# Altium PCB Sheet1.PcbDoc
Units mm, origin at the board's own origin, x right, y up, seen from the top; angles counter-clockwise.
Board outline 50 x 50 mm, 6 copper layers (L1, L2, L3, L4, L5, L6), stack 0.816 mm thick; 41 components, 27 nets, 119 pads, 58 vias.
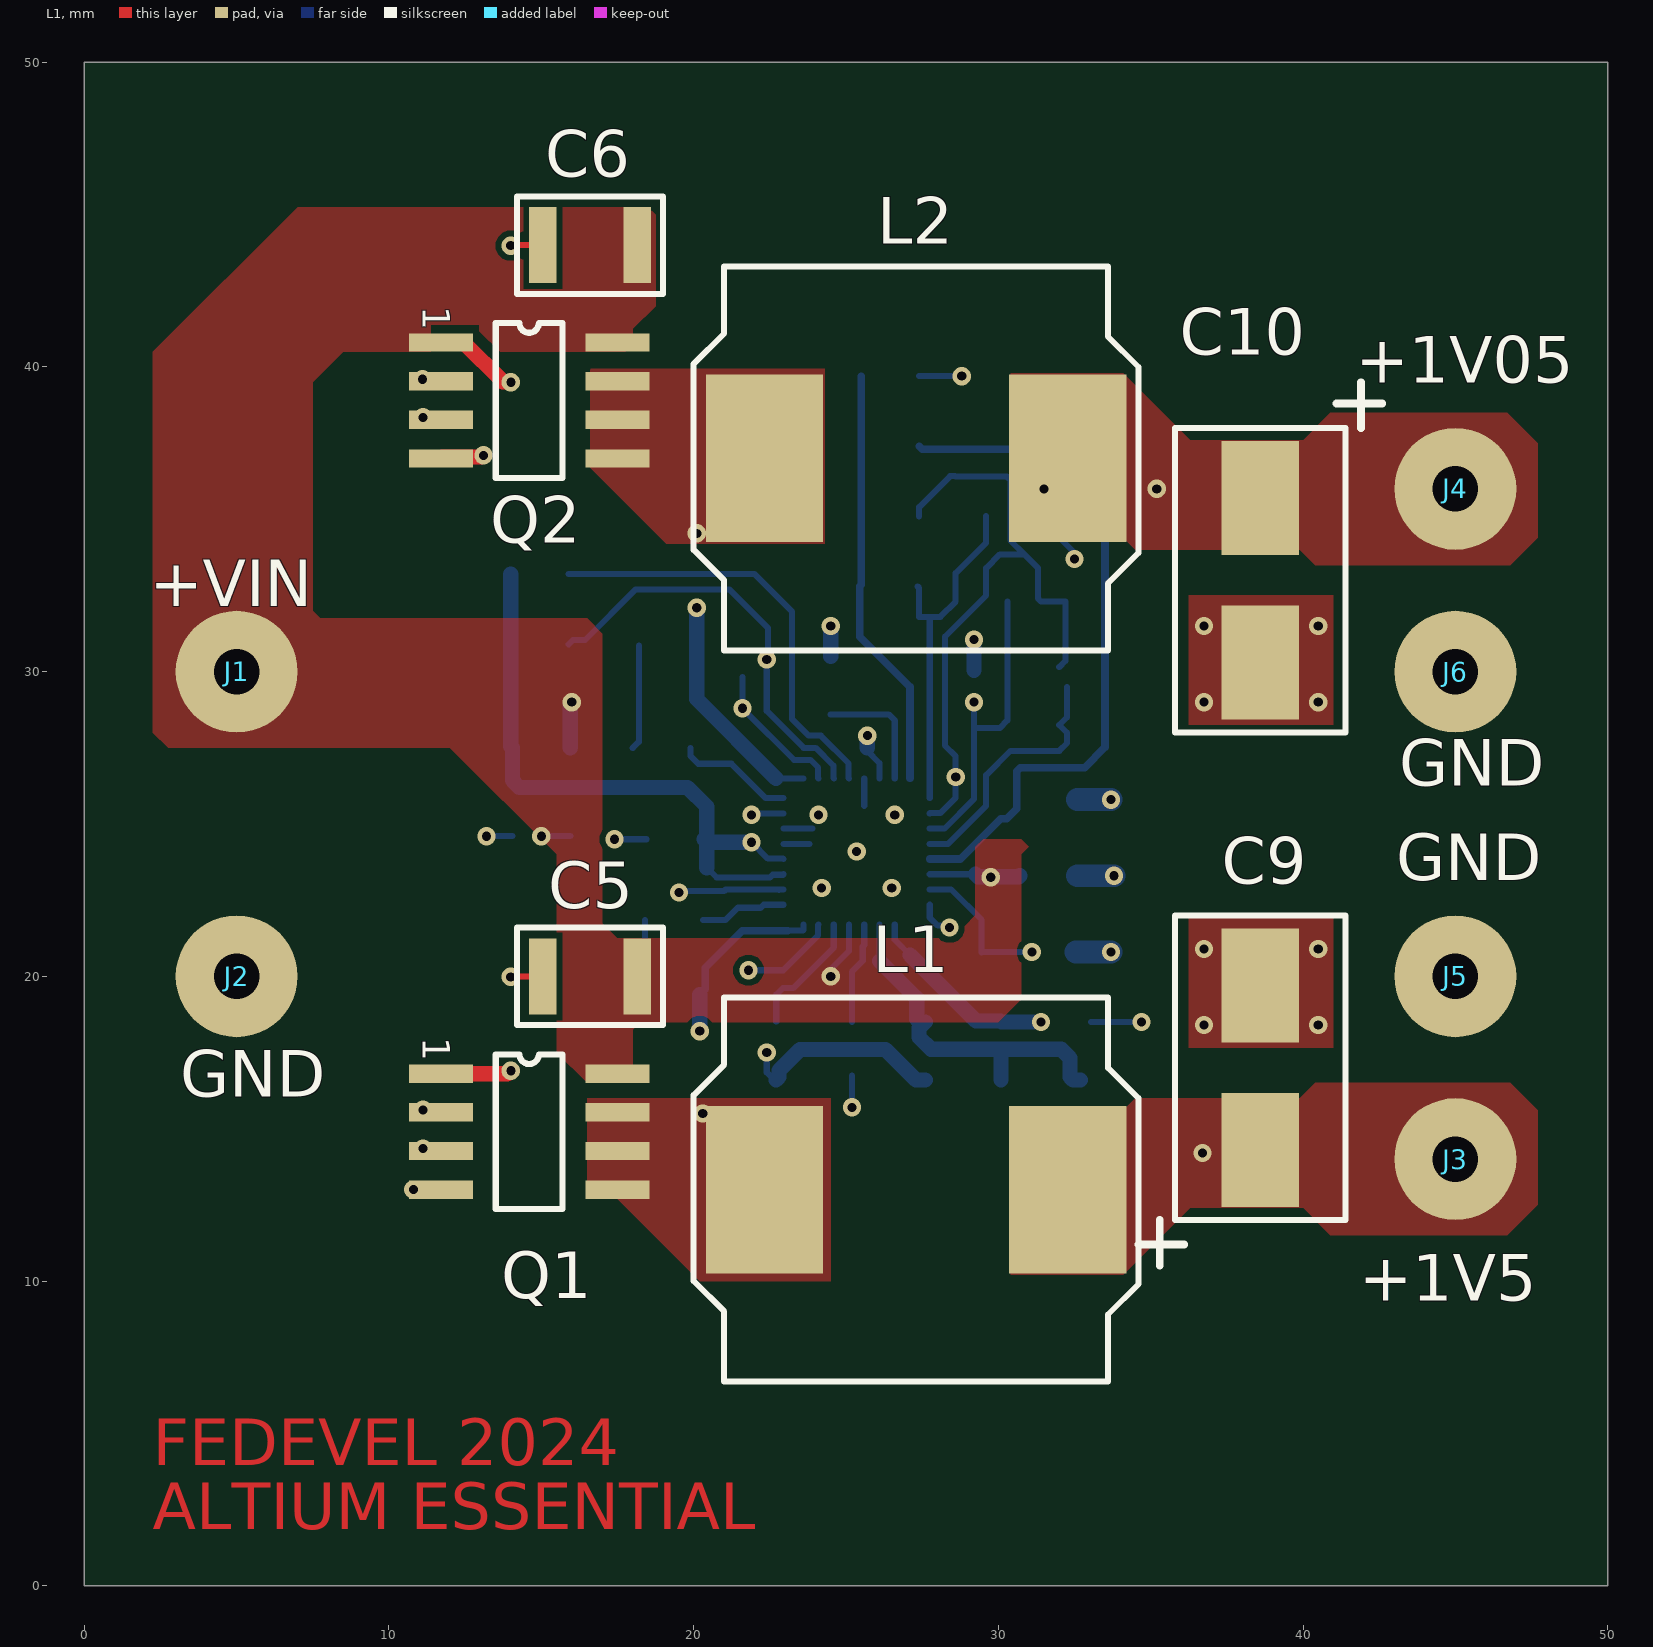
[diagram p0: L1 view]
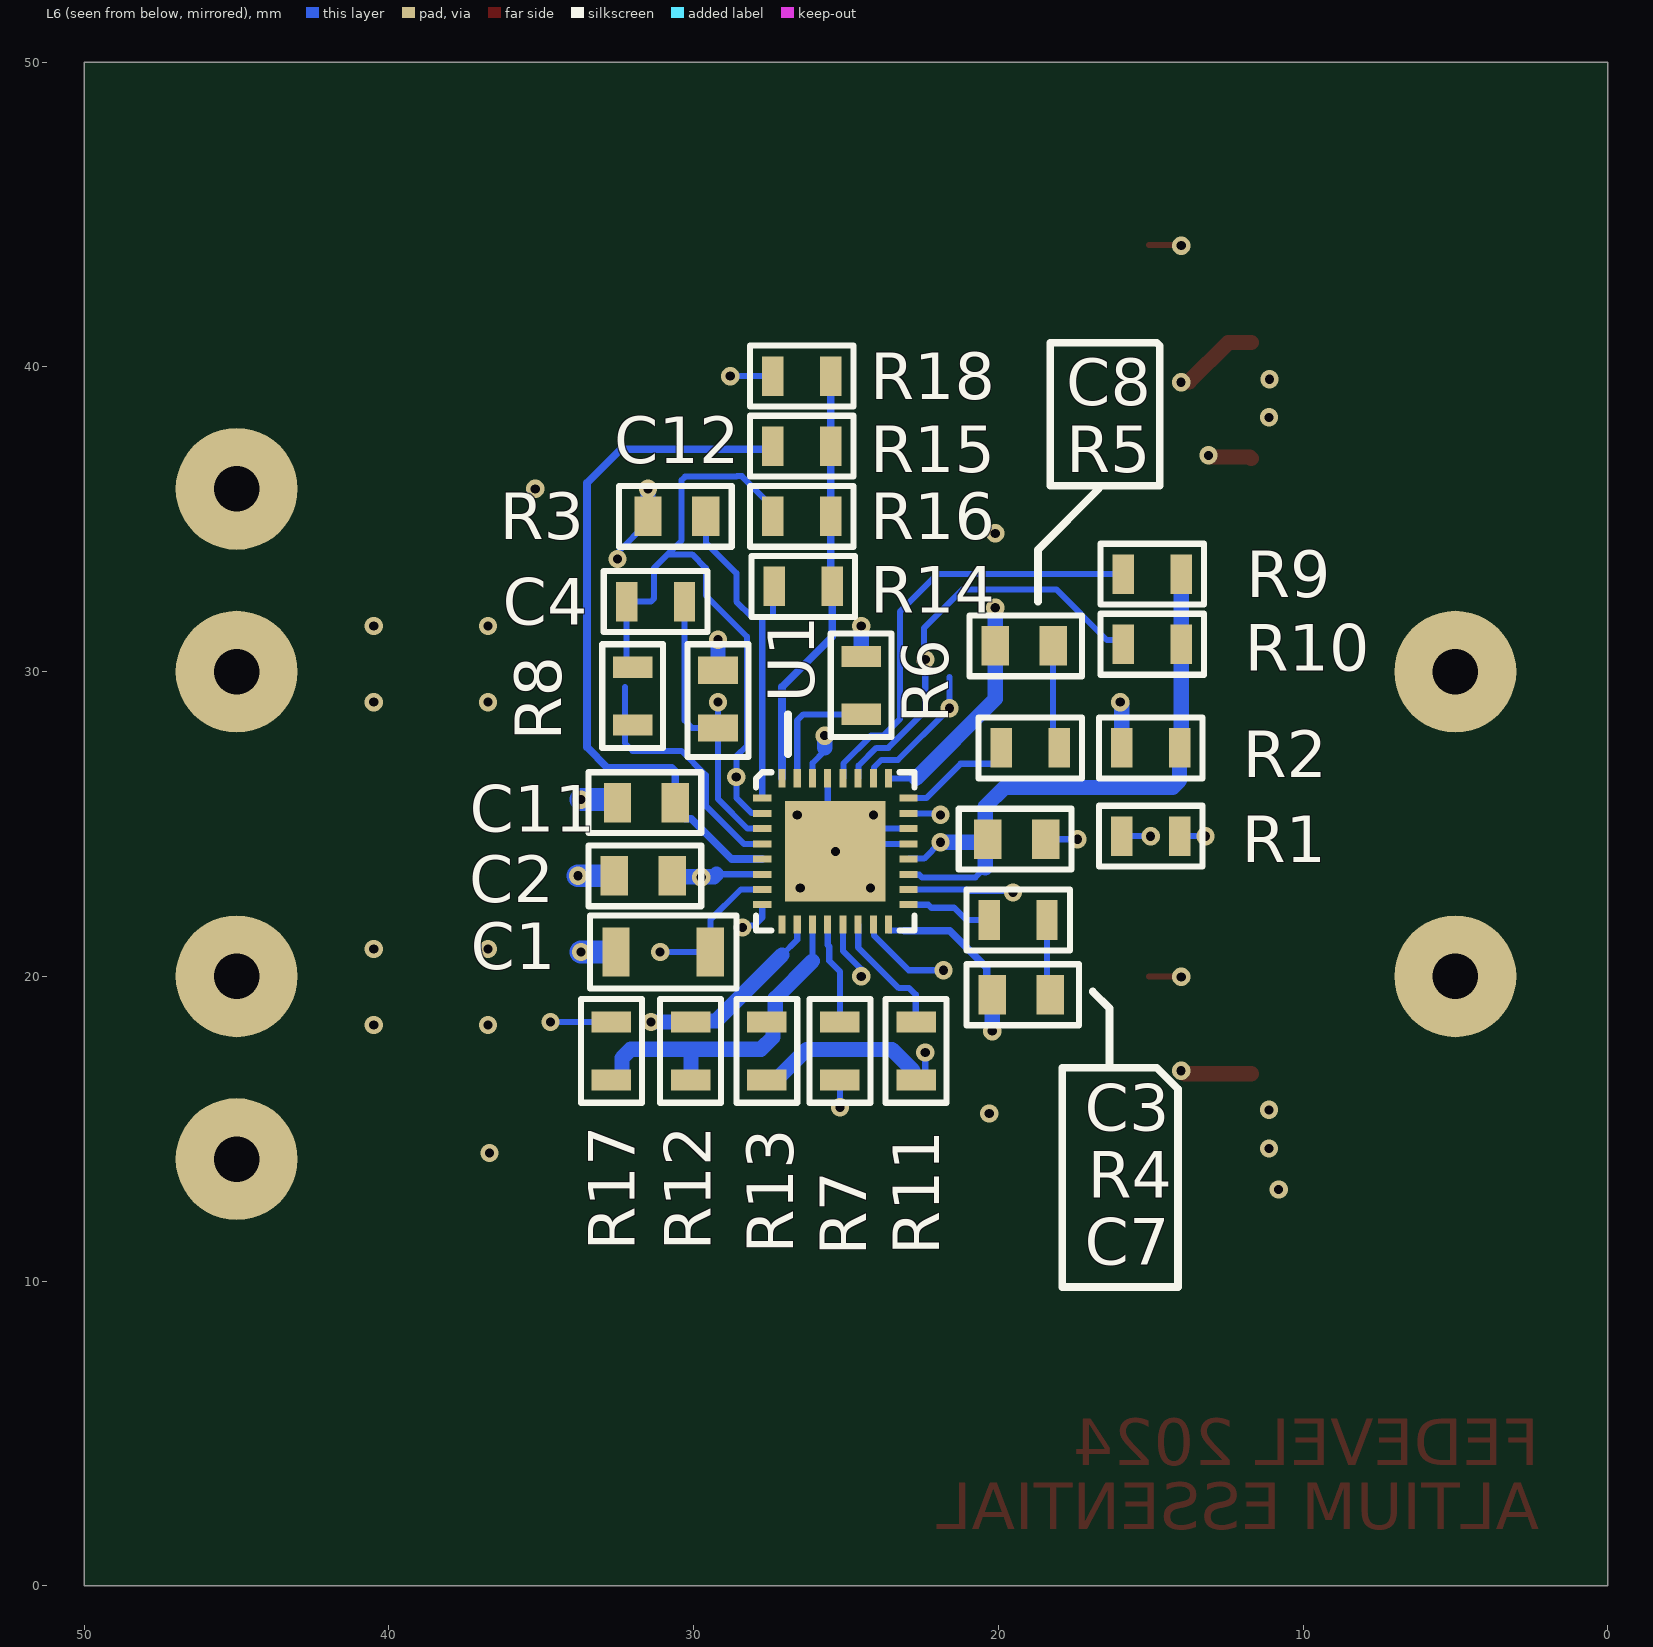
[diagram p1: L6 view, seen from below]
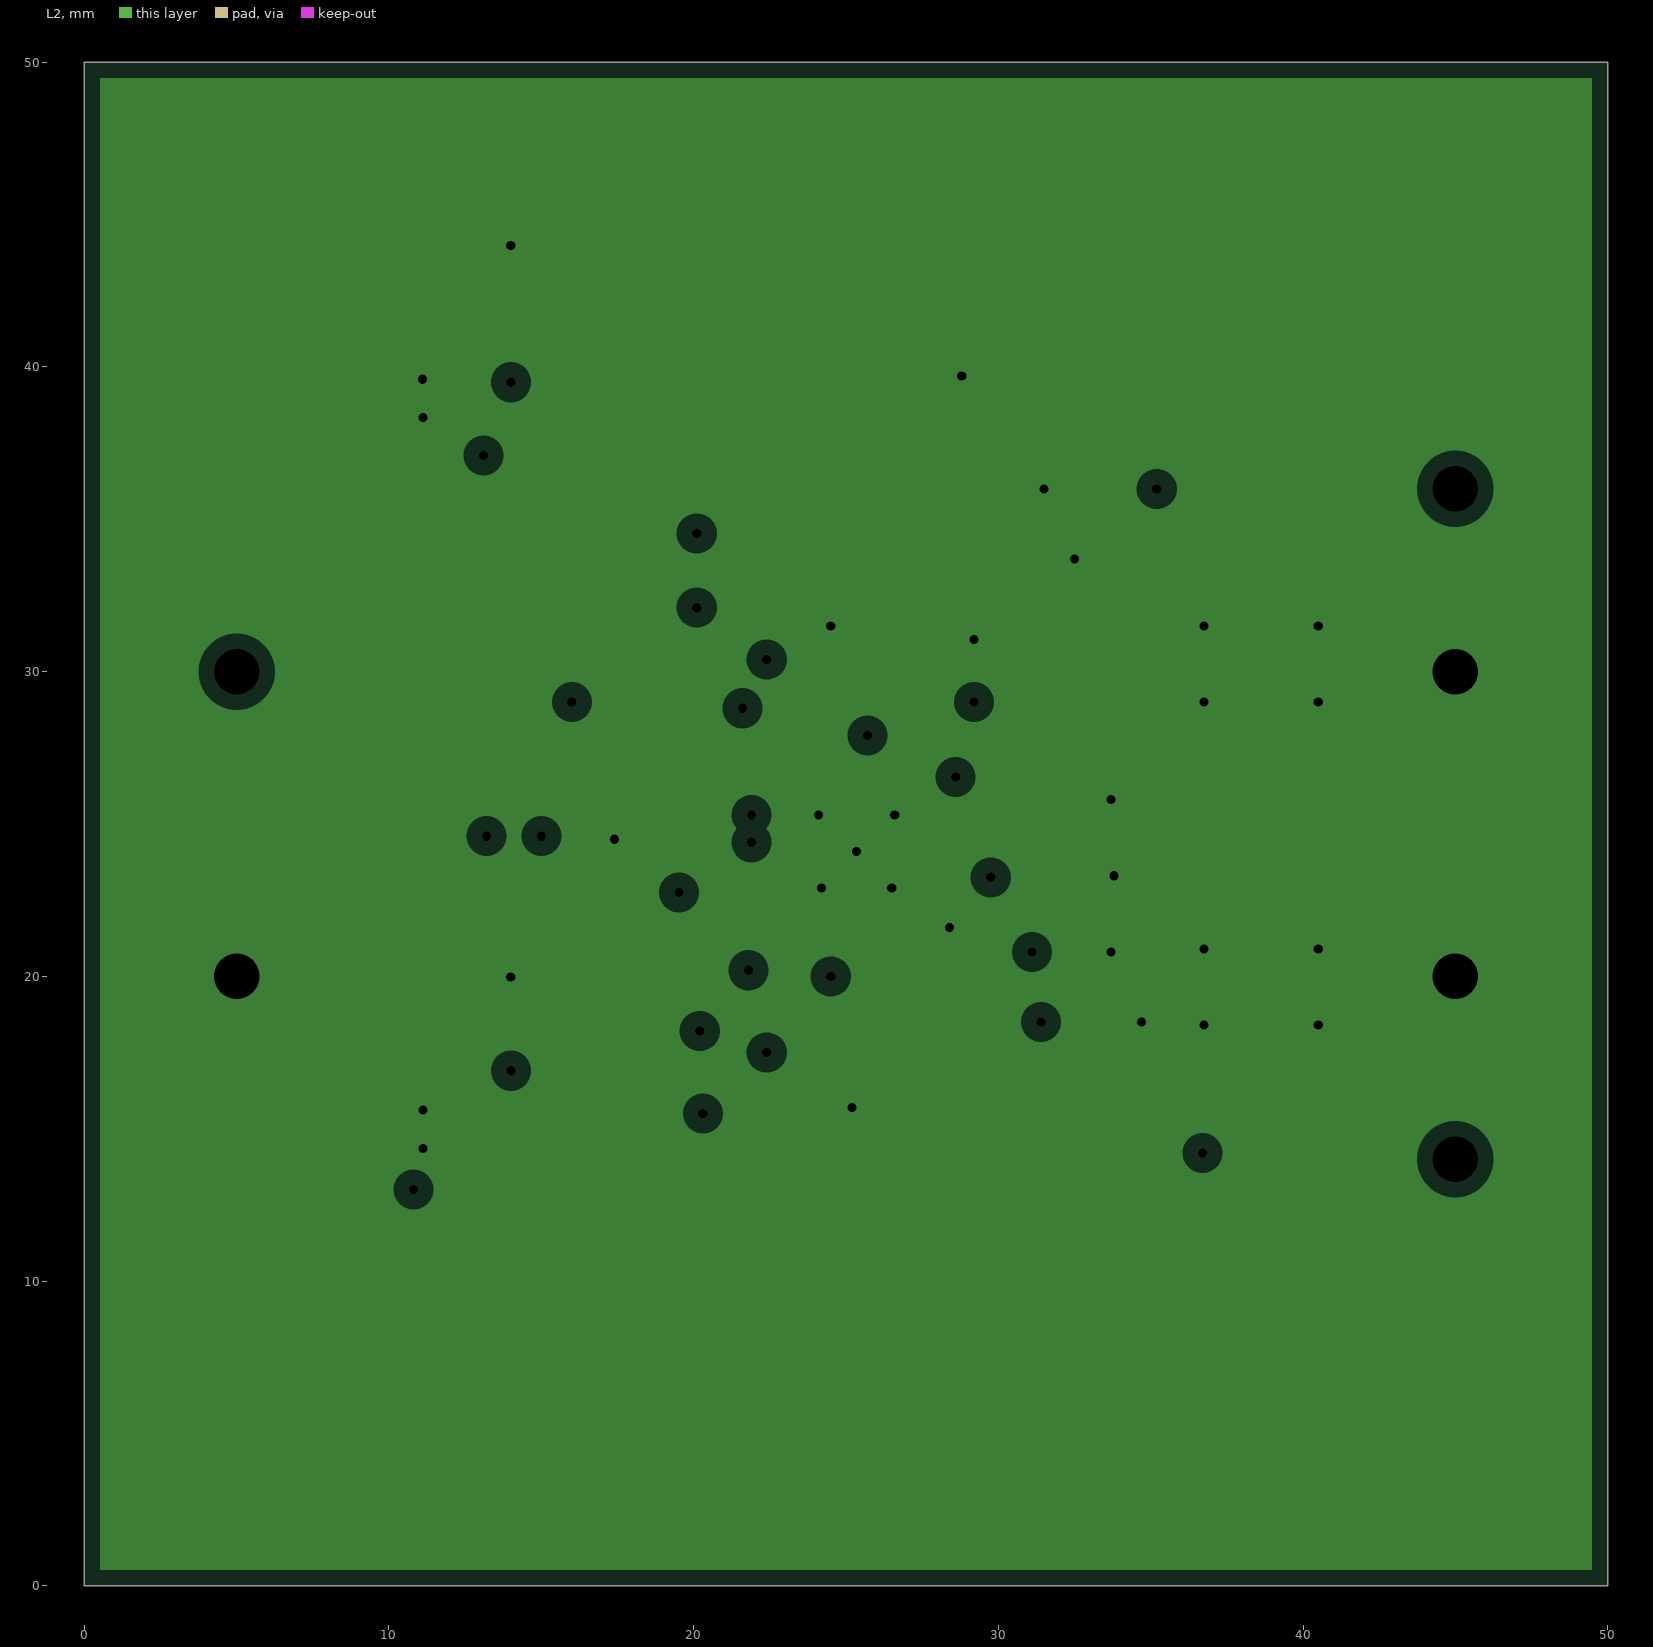
[diagram p2: L2, clearances drawn from the general rule]
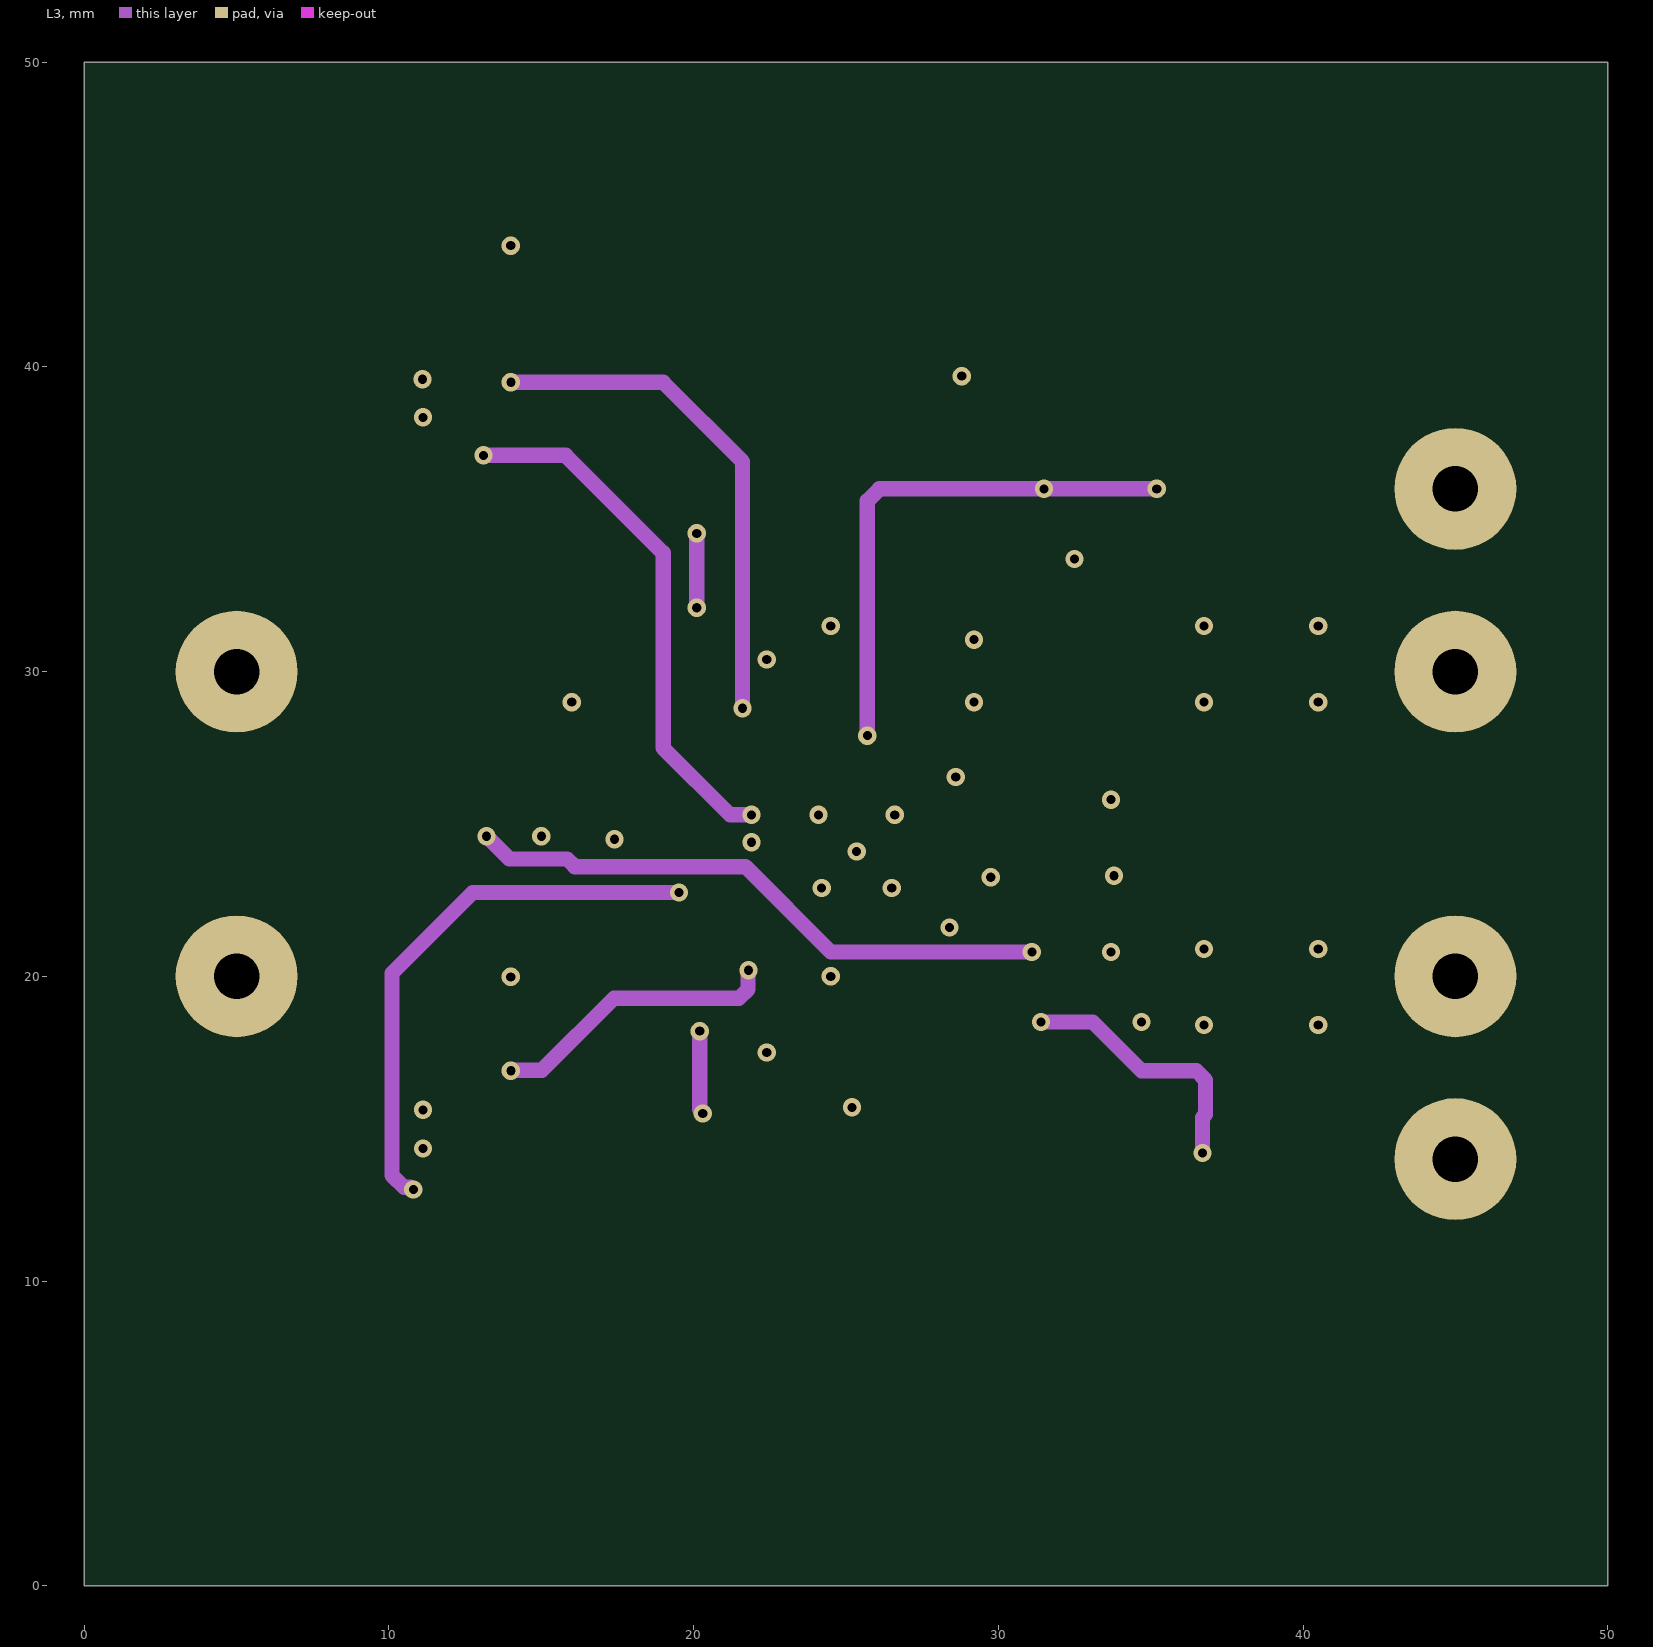
[diagram p3: L3]
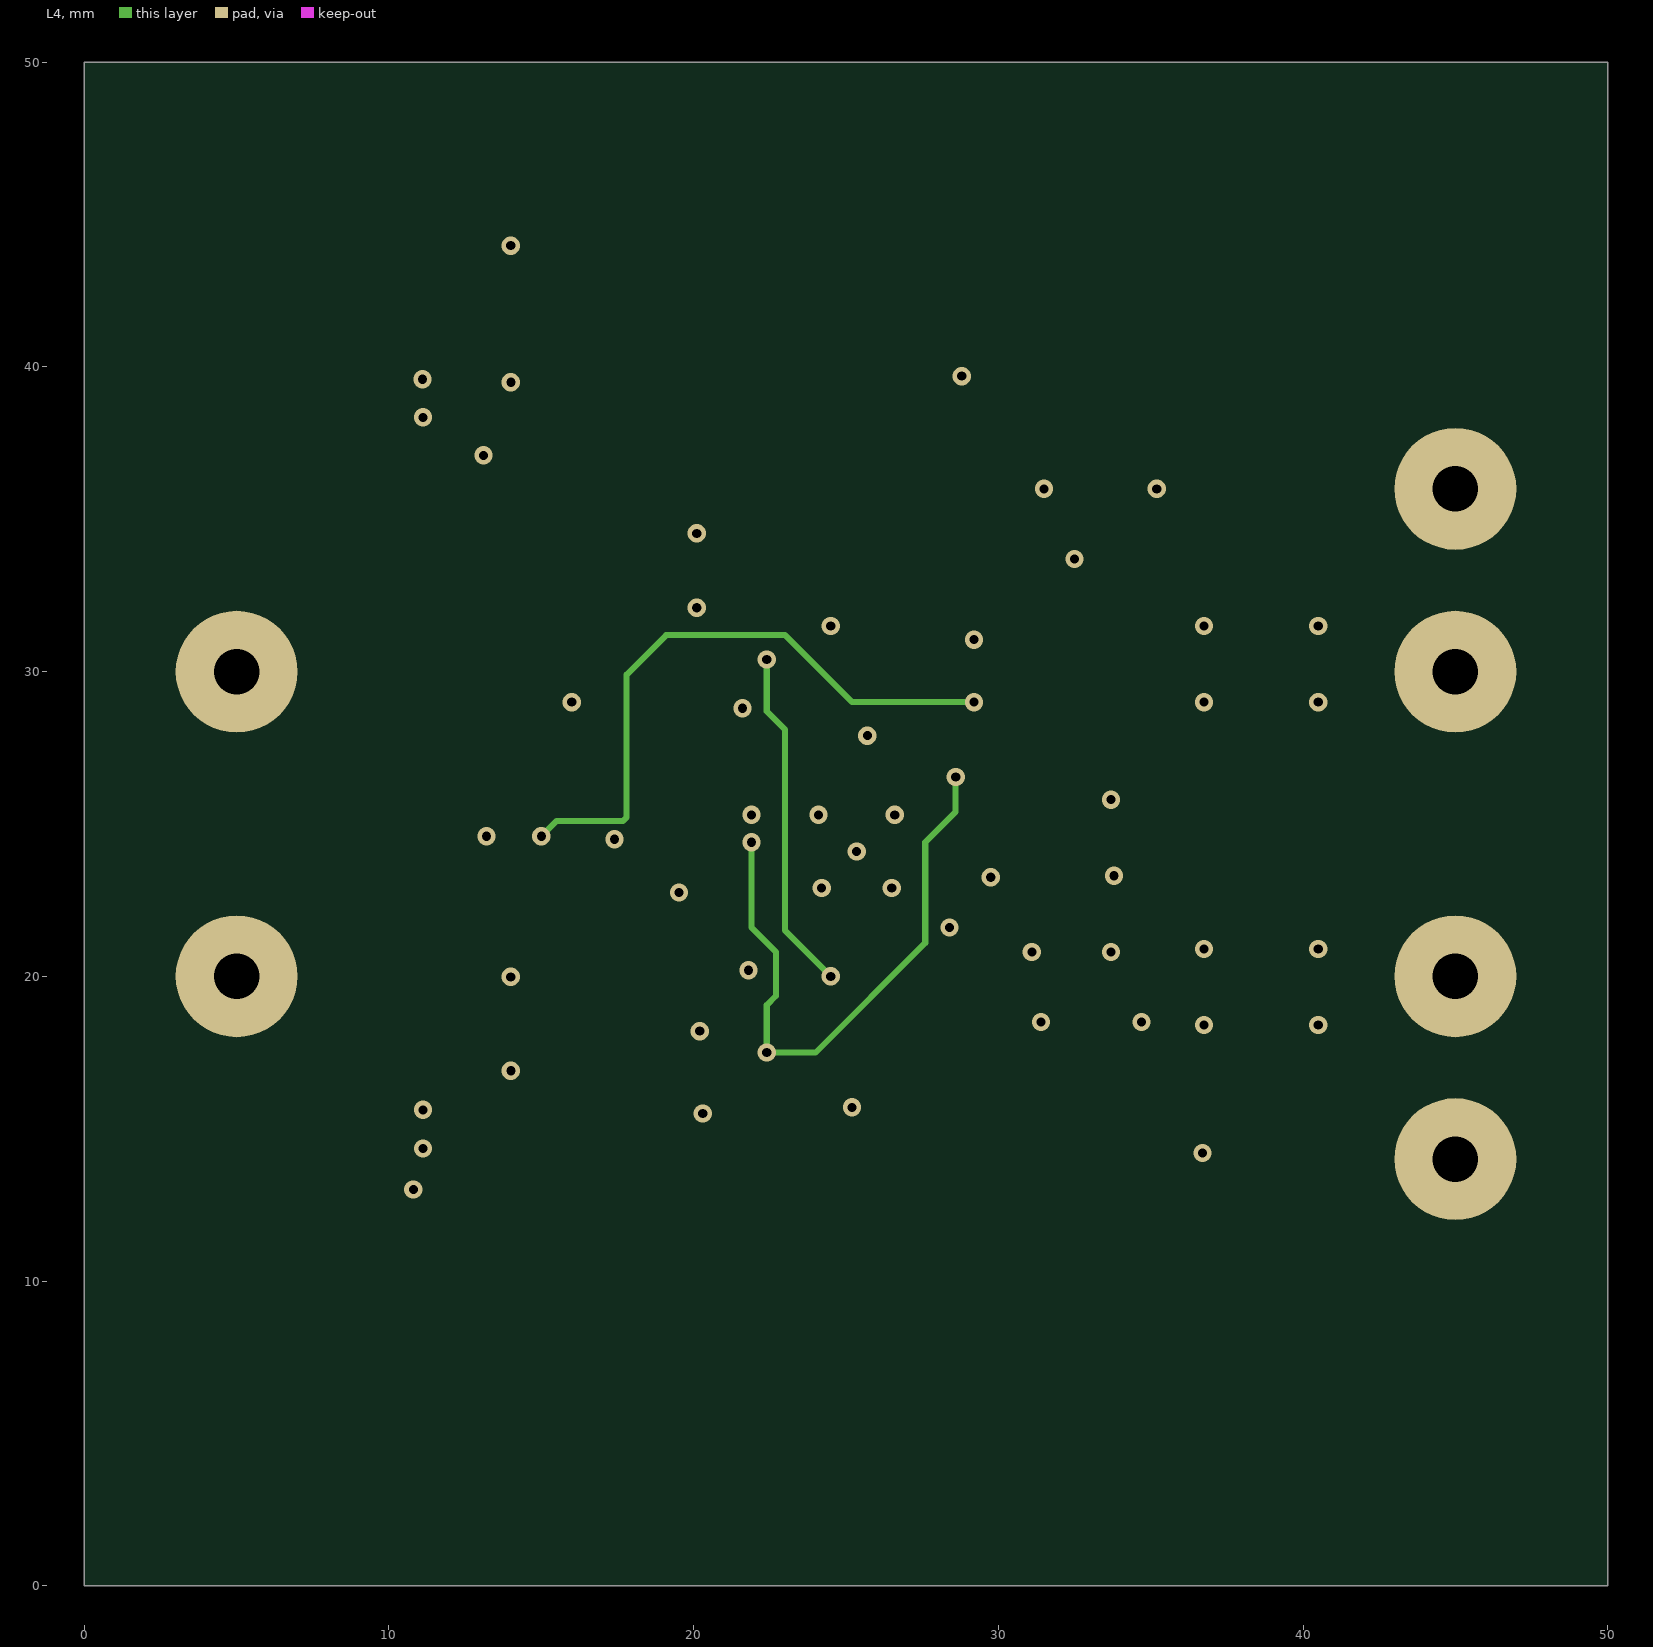
[diagram p4: L4]
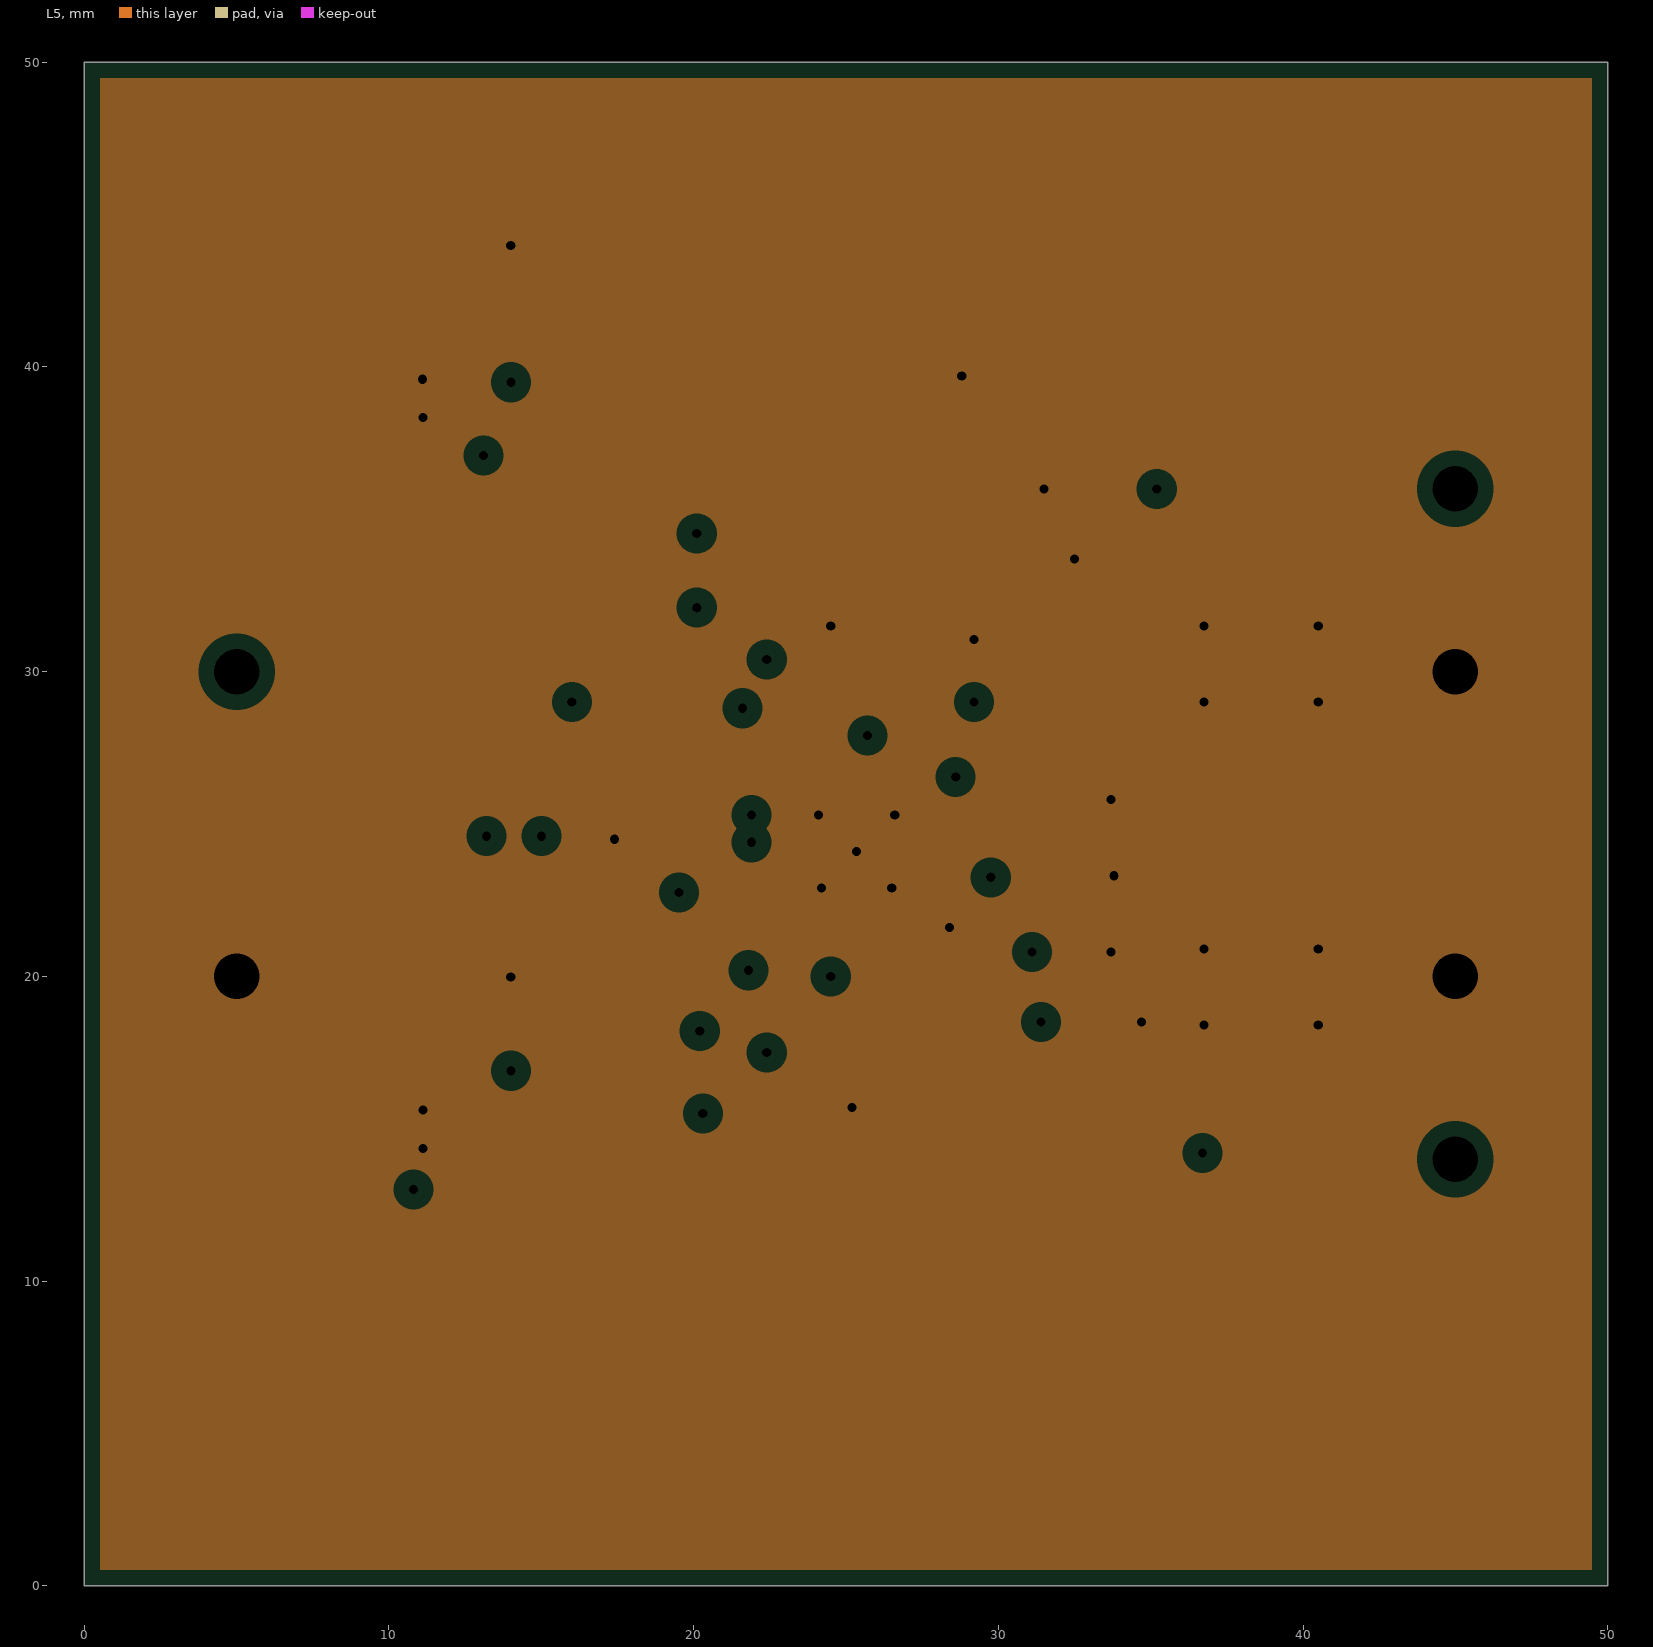
[diagram p5: L5, clearances drawn from the general rule]

## Layer stack, top to bottom
Top Solder: solder mask 0.0102, Solder Resist, Dk 3.5
L1: signal copper 0.0356
Dielectric 2: prepreg 0.0711, PP-006, Dk 4.1
L2: plane copper 0.035, net GND
Dielectric 3: prepreg 0.0711, PP-006, Dk 4.1
L3: signal copper 0.035
Dielectric 4: prepreg 0.0711, PP-006, Dk 4.1
L4: signal copper 0.035
Dielectric 5: prepreg 0.0711, PP-006, Dk 4.1
L5: plane copper 0.035, net GND
Dielectric 1: dielectric 0.32, FR-4, Dk 4.8
L6: signal copper 0.0356
Bottom Solder: solder mask 0.0102, Solder Resist, Dk 3.5

## Board outline
0,0 50,0 50,50 0,50

## Design rules (kind name [scope] priority, off if disabled: settings)
Clearance [All] p1: gap=0.2 ignorepadtopadclearanceinfootprint=FALSE
ComponentClearance [All] p1: gap=0.1 collisioncheckmode=3 verticalgap=0.1 showdistances=FALSE
MinimumSolderMaskSliver [All] p1: minsoldermaskwidth=0.1
PlaneClearance [All] p1: clearance=0.508
PlaneConnect [All] p1: planeconnectstyle=Relief reliefexpansion=0.508 reliefentries=4 reliefconductorwidth=0.254 reliefairgap=0.254
PolygonConnect [All] p1: connectstyle=Direct reliefconductorwidth=0.254 reliefentries=4 polygonreliefangle="90 Angle" airgapwidth=0.254
RoutingVias [All] p1: holewidth=0.3 width=0.6 viastyle="Through Hole" minholewidth=0.3 minwidth=0.6 maxholewidth=0.3 maxwidth=0.6
SilkToSolderMaskClearance [IsPad] p1: minsilkscreentomaskgap=0.1 clearancetoexposedcopper=TRUE
SolderMaskExpansion [All] p1: expansion=0.102 istentingtop=FALSE
Width [All] p1: maxlimit=10 minlimit=0.2 preferedwidth=0.2
25 further rules are at their usual default settings.

## Components (designator, comment, footprint, x,y, rotation, side; value= is the part's Value field where it differs from the comment)
C1 "4u7, 50V" C1206 31,20.8 r180 bottom value=4.7uF
C2 "1uF, 50V" C0805 31.65,23.3 r180 bottom value=1uF
C3 "1uF, 50V" C0805 19.4,24.5 r0 bottom value=1uF
C4 "1uF, 50V" C0805 29.2,29.1 r270 bottom value=1uF
C5 "10uF" C1210 16.6,20 r0 top
C6 "10uF" C1210 16.6,44 r0 top
C7 "100nF,50V" C0805 19.25,19.396 r180 bottom value=100nF
C8 "220nF, 50V" C0805 19.15,30.85 r180 bottom value=220nF
C9 "330uF, 10V" 7343-43 38.6,17 r90 top value=330uF
C10 "330uF, 10V" 7343-43 38.6,33 r270 top value=330uF
C11 "10nF, 50V" C0805 31.55,25.7 r0 bottom value=10nF
C12 "100nF,50V" C0805 30.55,35.1 r0 bottom value=100nF
J1 "400x150" PAD_400x150 5,30 r0 top
J2 "400x150" PAD_400x150 5,20 r0 top
J3 "400x150" PAD_400x150 45,14 r0 top
J4 "400x150" PAD_400x150 45,36 r0 top
J5 "400x150" PAD_400x150 45,20 r0 top
J6 "400x150" PAD_400x150 45,30 r0 top
L1 "3u3" DR125 27.3,13 r180 top value=3.3uH
L2 "2u2" DR125 27.3,37 r0 top value=2.2uH
Q1 "SI4816BDY-T1-E3" SO-8 14.6,14.9 r0 top
Q2 "SI4816BDY-T1-E3" SO-8 14.6,38.9 r0 top
R1 "0R" R0805 15,24.6 r180 bottom
R2 "0R" R0805 15,27.5 r180 bottom
R3 "10R" R0805 31.25,32.3 r180 bottom
R4 "1R" R0805 19.35,21.85 r0 bottom
R5 "1R" R0805 18.95,27.5 r180 bottom
R6 "200K" R0805 24.5,29.55 r90 bottom value=200kR
R7 "200K" R0805 25.2,17.55 r90 bottom value=200kR
R8 "10K" R0805 32,29.2 r270 bottom value=10kR
R9 "200K" R0805 14.95,33.2 r180 bottom value=200kR
R10 "200K" R0805 14.95,30.9 r180 bottom value=200kR
R11 "10K" R0805 22.7,17.55 r90 bottom value=10kR
R12 "DNP" R0805 30.1,17.55 r90 bottom
R13 "0R" R0805 27.6,17.55 r270 bottom
R14 "DNP" R0805 26.4,32.8 r0 bottom
R15 "0R" R0805 26.45,37.4 r0 bottom
R16 "DNP" R0805 26.45,35.1 r0 bottom
R17 "DNP" R0805 32.7,17.55 r270 bottom
R18 "DNP" R0805 26.45,39.7 r180 bottom
U1 "ISL6236AIRZ" L32.5X5B 25.35,24.1 r180 bottom

## Footprints (in the part's own frame and the unit in brackets; to place one, negate y for a bottom-side part, rotate by r counter-clockwise, add the part's x,y. Pads: shape width x height; smd on the part's side, far side on the other; paste and mask are expansions set on the pad)
7343-43 [mm]
  rect 3.75x2.55 smd: 1(-2.7,0) 2(2.7,0)
  silkscreen extent -6.5,-2.8 5,4
C0805 [mm]
  rect 0.9x1.3 smd: 1(-0.95,0) 2(0.95,0)
  silkscreen extent -1.8,-1 1.9,1
C1206 [mm]
  rect 0.9x1.6 smd: 1(-1.55,0) 2(1.55,0)
  silkscreen extent -2.4,-1.2 2.4,1.2
C1210 [mm]
  rect 0.9x2.5 smd: 1(-1.55,0) 2(1.55,0)
  silkscreen extent -2.4,-1.6 2.4,1.6
DR125 [mm]
  rect 3.85x5.5 smd: 1(-4.975,0) 2(4.975,0)
  silkscreen extent -7.3,-6.3 7.3,6.3
L32.5X5B [mm]
  rect 0.6x0.23 smd mask+0.051: 1(-2.4,1.75) 2(-2.4,1.25) 3(-2.4,0.75) 4(-2.4,0.25) 5(-2.4,-0.25) 6(-2.4,-0.75) 7(-2.4,-1.25) 8(-2.4,-1.75) 17(2.4,-1.75) 18(2.4,-1.25) 19(2.4,-0.75) 20(2.4,-0.25) 21(2.4,0.25) 22(2.4,0.75) 23(2.4,1.25) 24(2.4,1.75)
  rect 0.23x0.6 smd mask+0.051: 9(-1.75,-2.4) 10(-1.25,-2.4) 11(-0.75,-2.4) 12(-0.25,-2.4) 13(0.25,-2.4) 14(0.75,-2.4) 15(1.25,-2.4) 16(1.75,-2.4) 25(1.75,2.4) 26(1.25,2.4) 27(0.75,2.4) 28(0.25,2.4) 29(-0.25,2.4) 30(-0.75,2.4) 31(-1.25,2.4) 32(-1.75,2.4)
  rect 3.3x3.3 smd: 33(0,0)
  silkscreen extent -2.6,-2.6 2.6,2.6
PAD_400x150 [mm]
  round 4 hole 1.5: 1(0,0)
R0805 [mm]
  rect 0.7x1.3 smd: 1(-0.95,0) 2(0.95,0)
  silkscreen extent -1.7,-1 1.7,1
SO-8 [mm]
  rect 2.1x0.6 smd: 1(-2.9,1.905) 2(-2.9,0.635) 3(-2.9,-0.635) 4(-2.9,-1.905) 5(2.9,-1.905) 6(2.9,-0.635) 7(2.9,0.635) 8(2.9,1.905)
  silkscreen extent -1.1,-2.54 1.1,2.54

## Part data
C1: library part C3216X5R1H475K160AB, "C Series 1206 4.7 uF 50 V ±10 % Tolerance X5R SMT Multilayer Ceramic Capacitor", Case Code (Imperial)=1206, Case Code (Metric)=3216, Dielectric=X5R, Dielectric Material=Ceramic, Manufacturer=TDK, Max Operating Temperature=85°C, Min Operating Temperature=-55°C, Package Quantity=2000, Supplier Part Number=445-5994-1-ND, Tolerance=10%, Voltage Rating=50V, Case/Package=1206, Category="Ceramic Capacitors", ComponentLink1Description=https://datasheet.ciiva.com/24216/c3216x5r1h475k160ab-265269-24216325.pdf?src-supplier=Mouser, ComponentLink1URL=https://datasheet.ciiva.com/24216/c3216x5r1h475k160ab-265269-24216325.pdf?src-supplier=Mouser, ComponentLink2Description=https://datasheet.ciiva.com/6286/tdkmlcccaprange-6286230.pdf?src-supplier=Digikey, ComponentLink2URL=https://datasheet.ciiva.com/6286/tdkmlcccaprange-6286230.pdf?src-supplier=Digikey, ComponentLink3Description=https://datasheet.ciiva.com/6286/tdkmlcccaprange-6286233.pdf?src-supplier=Digikey, ComponentLink3URL=https://datasheet.ciiva.com/6286/tdkmlcccaprange-6286233.pdf?src-supplier=Digikey, ComponentLink4Description=https://datasheet.ciiva.com/6286/tdkmlcccaprange-6286236.pdf?src-supplier=Digikey, ComponentLink4URL=https://datasheet.ciiva.com/6286/tdkmlcccaprange-6286236.pdf?src-supplier=Digikey, Construction=Flat, Depth=1.6mm, Height=1.6mm, Lead Free="Lead Free", Length=3.2mm, Manufacturer Part Number=C3216X5R1H475K160AB, Mounting Technology="Surface Mount", Packaging="Tape and Reel", Pricing="1=0.73, 10=0.514, 50=0.4326, 100=0.3523, 500=0.29356, 1000=0.2472 (USD)", RoHS=Yes, RoHS Compliant=Yes, Series=C, Stock=60492, Supplier=Digikey, Termination=SMD/SMT, Voltage Rating (DC)=50V, Weight=0.000571oz, Width=1.6mm
C2 C3 C4: library part C0805C105K5RACTU, "Multilayer Ceramic Capacitor, 1 uF, 50 V, ± 10%, X7R, 0805 [2012 Metric]", Case Code (Imperial)=0805, Case Code (Metric)=2012, Dielectric=X7R, Dielectric Material=Ceramic, Manufacturer=KEMET, Max Operating Temperature=125°C, Min Operating Temperature=-55°C, Package Quantity=1, Supplier Part Number=399-C0805C105K5RAC7800CT-ND, Tolerance=10%, Voltage=50V, Case/Package=0805, Category="Ceramic Capacitors", ComponentLink1Description=https://datasheet.ciiva.com/7842/1732744-7842192.pdf?src-supplier=Element14, ComponentLink1URL=https://datasheet.ciiva.com/7842/1732744-7842192.pdf?src-supplier=Element14, ComponentLink2Description=https://datasheet.ciiva.com/5408/kem-c1002-x7r-smd-5408569.pdf?src-supplier=Mouser, ComponentLink2URL=https://datasheet.ciiva.com/5408/kem-c1002-x7r-smd-5408569.pdf?src-supplier=Mouser, Construction=Flat, Depth=1.25mm, Height=1.25mm, Length=2mm, Manufacturer Part Number=C0805C105K5RACTU, Mounting Technology="Surface Mount,PCB", Packaging="Tape and Reel", Pricing="1=0.35, 10=0.231, 50=0.1704, 100=0.1387, 500=0.10954, 1000=0.0925 (USD)", Reach SVHC Compliant=No, RoHS=Yes, RoHS Compliant=Yes, Series=C, Stock=63564, Supplier=Digikey, Termination=SMD/SMT, Thickness=0.055inch, Voltage Rating=50V, Voltage Rating (DC)=50V, Width=0.049inch
C5 C6: library part C1210C106K6PACTU, "Multilayer Ceramic Capacitor, 10 uF, 35 V, ± 10%, X5R, 1210 [3225 Metric]", Case Code (Imperial)=1210, Case Code (Metric)=3225, Dielectric=X5R, Dielectric Material=Ceramic, Manufacturer=KEMET, Max Operating Temperature=85°C, Min Operating Temperature=-55°C, Supplier Part Number=399-12070-1-ND, Tolerance=10%, Voltage=35V, Case/Package=1210, Category="Ceramic Capacitors", ComponentLink1Description=http://www.farnell.com/datasheets/2741192.pdf?src-supplier=Farnell, ComponentLink1URL=http://www.farnell.com/datasheets/2741192.pdf?src-supplier=Farnell, ComponentLink2Description=http://www.alliedelec.com/m/d/f3c02ddb98afa3dd1adcb801109671e9.pdf?src-supplier=Allied+Electronics, ComponentLink2URL=http://www.alliedelec.com/m/d/f3c02ddb98afa3dd1adcb801109671e9.pdf?src-supplier=Allied+Electronics, ComponentLink3Description=https://datasheet.octopart.com/C1210C106K6PACTU-KEMET-datasheet-83562113.pdf?src-supplier=Newark, ComponentLink3URL=https://datasheet.octopart.com/C1210C106K6PACTU-KEMET-datasheet-83562113.pdf?src-supplier=Newark, ComponentLink4Description=http://www.farnell.com/datasheets/2741192.pdf?src-supplier=Newark, ComponentLink4URL=http://www.farnell.com/datasheets/2741192.pdf?src-supplier=Newark, ComponentLink5Description=https://datasheet.octopart.com/C1210C106K6PACTU-KEMET-datasheet-86448939.pdf?src-supplier=Farnell, ComponentLink5URL=https://datasheet.octopart.com/C1210C106K6PACTU-KEMET-datasheet-86448939.pdf?src-supplier=Farnell, ComponentLink6Description=https://api.kemet.com/component-edge/download/datasheet/C1210C106K6PAC7800.pdf?src-supplier=Digikey, ComponentLink6URL=https://api.kemet.com/component-edge/download/datasheet/C1210C106K6PAC7800.pdf?src-supplier=Digikey, ComponentLink7Description=http://www.kemet.com/docfinder?Partnumber=C1210C106K6PAC7800&src-supplier=Digikey, ComponentLink7URL=http://www.kemet.com/docfinder?Partnumber=C1210C106K6PAC7800&src-supplier=Digikey, ComponentLink8Description=https://datasheet.octopart.com/C1210C106K6PACTU-KEMET-datasheet-130260269.pdf?src-supplier=TME, ComponentLink8URL=https://datasheet.octopart.com/C1210C106K6PACTU-KEMET-datasheet-130260269.pdf?src-supplier=TME, Depth=2.5mm, Dissipation Factor=2.5%, Height=1.9mm, Lead Free=5697LeadFree, Length=3.2mm, Manufacturer Part Number=C1210C106K6PACTU, Mounting Technology="Surface Mount", Packaging="Cut Tape", Pricing="1=0.72, 10=0.503, 50=0.424, 100=0.3452, 500=0.28766 (USD)", RoHS=Yes, RoHS Compliant=Yes, Series="SMD Comm X5R", Stock=29464, Supplier=Digikey, Termination=Solder, Voltage Rating=35V, Voltage Rating (DC)=35V
C7 C12: library part C0805C104K5RACTU, "Multilayer Ceramic Capacitor, 0.1 uF, 50 V, ± 10%, X7R, 0805 [2012 Metric]", Case Code (Imperial)=0805, Case Code (Metric)=2012, Dielectric=X7R, Manufacturer=KEMET, Max Operating Temperature=125°C, Min Operating Temperature=-55°C, Package Quantity=4000, Supplier Part Number=399-C0805C104K5RAC7800CT-ND, Temperature Coefficient=30ppm/°C, Tolerance=10%, Voltage=500V, Voltage Rating=50V, Case/Package=0805, Category="Ceramic Capacitors", Construction=Flat, Depth=1.25mm, Height=0.9mm, Lead Free=5697LeadFree, Lead Pitch=0.75mm, Length=2mm, Manufacturer Part Number=C0805C104K5RACTU, Material=4241ConductorMaterial, Mounting Technology="Surface Mount,PCB", Packaging="Tape and Reel", Pins=2, Pricing="1=0.14, 10=0.091, 50=0.0546, 100=0.043, 500=0.03172, 1000=0.02627 (USD)", Radiation Hardening=No, Reach SVHC Compliant=No, RoHS=Yes, RoHS Compliant=Yes, Series="SMD Comm X7R", Stock=3522424, Supplier=Digikey, Termination=SMD/SMT, Voltage Rating (DC)=50V, Width=1.2mm
C8: library part C0805C224K5RACTU, "Multilayer Ceramic Capacitor, 0.22 uF, 50 V, ± 10%, X7R, 0805 [2012 Metric]", Case Code (Imperial)=0805, Case Code (Metric)=2012, Dielectric=X7R, Dielectric Material=Ceramic, Manufacturer=KEMET, Max Operating Temperature=125°C, Min Operating Temperature=-55°C, Package Quantity=4000, Supplier Part Number=399-C0805C224K5RACTUCT-ND, Temperature Coefficient=30ppm/°C, Tolerance=10%, Voltage=50V, Case/Package=0805, Category="Ceramic Capacitors", ComponentLink1Description=https://datasheet.ciiva.com/7842/kem-c1002-x7r-smd-7842582.pdf?src-supplier=Element14, ComponentLink1URL=https://datasheet.ciiva.com/7842/kem-c1002-x7r-smd-7842582.pdf?src-supplier=Element14, ComponentLink2Description=https://datasheet.ciiva.com/28682/1851736-28682316.pdf?src-supplier=Element14, ComponentLink2URL=https://datasheet.ciiva.com/28682/1851736-28682316.pdf?src-supplier=Element14, ComponentLink3Description=https://datasheet.ciiva.com/14589/70095383-14589519.pdf?src-supplier=Allied+Electronics, ComponentLink3URL=https://datasheet.ciiva.com/14589/70095383-14589519.pdf?src-supplier=Allied+Electronics, ComponentLink4Description=https://datasheet.ciiva.com/14603/70095383-14603247.pdf?src-supplier=Allied+Electronics, ComponentLink4URL=https://datasheet.ciiva.com/14603/70095383-14603247.pdf?src-supplier=Allied+Electronics, Construction=Flat, Depth=1.25mm, Dissipation Factor=2.5%, Height=1.1mm, Lead Free=5697LeadFree, Lead Pitch=0.75mm, Length=2mm, Manufacturer Part Number=C0805C224K5RACTU, Material=4241ConductorMaterial, Mounting Technology="Surface Mount,PCB", Packaging="Tape and Reel", Pricing="1=0.16, 10=0.106, 50=0.063, 100=0.0496, 500=0.03666, 1000=0.03035 (USD)", Radiation Hardening=No, Reach SVHC Compliant=No, RoHS=Yes, RoHS Compliant=Yes, Series="SMD Comm X7R", Stock=582244, Supplier=Digikey, Termination=SMD/SMT, Voltage Rating=50V, Voltage Rating (DC)=50V, Width=1.2mm
C9 C10: library part T530X337M010ATE004, "Cap Tant Solid 330uF 10V X CASE 20% (7.3 X 4.3 X 4mm) SMD 7343-43 0.004 Ohm 125 C T/R", Case Code (Imperial)=2917, Case Code (Metric)=7343, ESR (Equivalent Series Resistance)=4mR, Leakage Current=330uA, Manufacturer=KEMET, Max Operating Temperature=125°C, Min Operating Temperature=-55°C, Package Quantity=500, Ripple Current=8.2A, Supplier Part Number=399-10378-1-ND, Tolerance=20%, Voltage=10V, Case/Package=2917, Category="Polymer Capacitors", ComponentLink1Description=https://datasheet.ciiva.com/11794/0900766b80deaa91-11794477.pdf?src-supplier=Rs, ComponentLink1URL=https://datasheet.ciiva.com/11794/0900766b80deaa91-11794477.pdf?src-supplier=Rs, ComponentLink2Description=https://datasheet.ciiva.com/14593/70096008-14593753.pdf?src-supplier=Allied+Electronics, ComponentLink2URL=https://datasheet.ciiva.com/14593/70096008-14593753.pdf?src-supplier=Allied+Electronics, Construction=Flat, Depth=4.3mm, Dissipation Factor=8%, Features="General Purpose", Height=4mm, Length=7.3mm, Manufacturer Part Number=T530X337M010ATE004, Mounting Technology="Surface Mount,PCB", Packaging="Tape and Reel", Polarity=Polar, Pricing="1=7.14, 10=6.191, 50=5.5562, 100=4.8259 (USD)", Reach SVHC Compliant=No, RoHS=Yes, RoHS Compliant=Yes, Series=T530, Stock=351, Supplier=Digikey, Termination=SMD/SMT, Voltage Rating=10V, Voltage Rating (DC)=10V, Width=4.3mm
C11: library part C0805F103K5RACTU, "0805 C 10nF Ceramic Multilayer Capacitor; 50 VDC; +125degC; X7R Dielec; +/-10%", Case Code (Imperial)=0805, Case Code (Metric)=2012, Dielectric=X7R, Manufacturer=KEMET, Max Operating Temperature=125°C, Min Operating Temperature=-55°C, Package Quantity=1, Supplier Part Number=399-C0805F103K5RAC7800CT-ND, Tolerance=10%, Voltage Rating=50V, Case/Package=0805, Category="Ceramic Capacitors", ComponentLink1Description=https://datasheet.ciiva.com/146/docfinderpartnumber-c0805f103k5ractu-146278.pdf?src-supplier=Digikey, ComponentLink1URL=https://datasheet.ciiva.com/146/docfinderpartnumber-c0805f103k5ractu-146278.pdf?src-supplier=Digikey, ComponentLink2Description=https://datasheet.ciiva.com/7842/48829-7842408.pdf?src-supplier=Element14, ComponentLink2URL=https://datasheet.ciiva.com/7842/48829-7842408.pdf?src-supplier=Element14, ComponentLink3Description=https://datasheet.ciiva.com/7842/48829-7842407.pdf?src-supplier=Element14, ComponentLink3URL=https://datasheet.ciiva.com/7842/48829-7842407.pdf?src-supplier=Element14, Construction=Flat, Depth=1.25mm, Height=0.9mm, Lead Free=5697LeadFree, Lead Pitch=0.75mm, Length=2mm, Manufacturer Part Number=C0805F103K5RACTU, Mounting Technology="Surface Mount", Packaging="Cut Tape", Pins=2, Pricing="1=0.35, 10=0.225, 50=0.158, 100=0.1276, 500=0.09478, 1000=0.08293 (USD)", Reach SVHC Compliant=No, RoHS=Yes, RoHS Compliant=Yes, Series=FO-CAP, Stock=9976, Supplier=Digikey, Termination=SMD/SMT, Thickness=0.039inch, Voltage Rating (AC)=50V, Voltage Rating (DC)=50V, Width=0.049inch
J1 J2 J3 J4 J5 J6: library part PAD, "Pad with a hole of 4mm x 1.5mm"
L1: library part DR125-3R3-R, "Inductor Power Shielded Drum Core 3.3uH 20% 100KHz Ferrite 9.26A 6.3mOhm DCR T/R", Case/Package=Nonstandard, Current Rating=9.26A, DC Resistance (DCR)=6.3mR, Inductance Tolerance=20%, Manufacturer="Eaton Cooper", Max Operating Temperature=125°C, Min Operating Temperature=-40°C, Package Quantity=600, Saturation Current=12.7A, Supplier Part Number=513-1529-1-ND, Test Frequency=100kHz, Category="Fixed Inductors", ComponentLink1Description=https://datasheet.ciiva.com/26858/getdatasheetpartid-251124-26858392.pdf?src-supplier=Verical, ComponentLink1URL=https://datasheet.ciiva.com/26858/getdatasheetpartid-251124-26858392.pdf?src-supplier=Verical, ComponentLink2Description=https://datasheet.ciiva.com/16295/bus-elx-ds-4315-dr-series-16295562.pdf?src-supplier=Future+Electronics, ComponentLink2URL=https://datasheet.ciiva.com/16295/bus-elx-ds-4315-dr-series-16295562.pdf?src-supplier=Future+Electronics, ComponentLink3Description=https://datasheet.ciiva.com/30081/4a32919a-7470-4ae0-be45-b59e3a1351ef-30081146.pdf?src-supplier=Onlinecomponents.com, ComponentLink3URL=https://datasheet.ciiva.com/30081/4a32919a-7470-4ae0-be45-b59e3a1351ef-30081146.pdf?src-supplier=Onlinecomponents.com, ComponentLink4Description=https://datasheet.ciiva.com/5707/87246-5707962.pdf?src-supplier=Farnell, ComponentLink4URL=https://datasheet.ciiva.com/5707/87246-5707962.pdf?src-supplier=Farnell, Core Material=Ferrite, Depth=12.5mm, Height=6mm, Height - Seated (Max)=0.236inch, Length=12.5mm, Manufacturer Part Number=DR125-3R3-R, Max Current Rating=9.26A, Max DC Current=9.26A, Military Standard=Not, Mounting Technology="Surface Mount", Packaging="Tape and Reel", Pins=2, Pricing="1=1.21, 10=1.02, 25=0.9276, 50=0.8718, 100=0.7234, 250=0.66776 (USD)", Radiation Hardening=No, Reach SVHC Compliant=No, RMS Current (Irms)=9.26A, RoHS=Yes, Series=DR, Shielding=Shielded, Stock=26681, Supplier=Digikey, Termination=SMD/SMT, Tolerance=20%, Weight=0.144oz, Width=0.492inch
L2: library part DR125-2R2-R, "Ind Power Shielded Wirewound 2.2uH 20% 100KHz Ferrite 10.9A T/R", Case/Package=Nonstandard, Current Rating=10.9A, DC Resistance (DCR)=4.5mR, Inductance Tolerance=20%, Manufacturer="Eaton Cooper", Max Operating Temperature=125°C, Min Operating Temperature=-40°C, Package Quantity=600, Saturation Current=15A, Self Resonant Frequency=100kHz, Supplier Part Number=513-1662-1-ND, Category="Fixed Inductors", ComponentLink1Description=https://datasheet.ciiva.com/14667/0900766b8116a153-14667792.pdf?src-supplier=Rs, ComponentLink1URL=https://datasheet.ciiva.com/14667/0900766b8116a153-14667792.pdf?src-supplier=Rs, ComponentLink2Description=https://datasheet.ciiva.com/26926/getdatasheetpartid-571249-26926912.pdf?src-supplier=Verical, ComponentLink2URL=https://datasheet.ciiva.com/26926/getdatasheetpartid-571249-26926912.pdf?src-supplier=Verical, ComponentLink3Description=https://datasheet.ciiva.com/8004/87246-8004874.pdf?src-supplier=Element14, ComponentLink3URL=https://datasheet.ciiva.com/8004/87246-8004874.pdf?src-supplier=Element14, Core Material=Ferrite, DC Current=10.9A, Depth=12.5mm, Height=6mm, Height - Seated (Max)=0.236inch, Lead Free="Lead Free", Length=12.5mm, Manufacturer Part Number=DR125-2R2-R, Max Current Rating=10.9A, Max DC Current=10.9A, Military Standard=Not, Mounting Technology="Surface Mount", Packaging="Tape and Reel", Pins=2, Pricing="1=1.21, 10=1.02, 25=0.9276, 50=0.8718, 100=0.7234, 250=0.6678 (USD)", Radiation Hardening=No, Reach SVHC Compliant=No, RMS Current (Irms)=10.9A, RoHS=Yes, RoHS Compliant=Yes, Series=DR, Shielding=Shielded, Stock=2132, Supplier=Digikey, Termination=SMD/SMT, Test Frequency=100kHz, Tolerance=20%, Weight=0.144oz, Width=0.492inch
Q1 Q2: "Transistor MOSFET Array Dual N-CH 30V 5.8A/8.2A 8-Pin SOIC T/R", Case/Package=SO, Continuous Drain Current (ID)=8.2A, Drain to Source Resistance=11.5mR, Drain to Source Voltage (Vdss)=30V, Drain-source On Resistance-Max=18.5mR, Gate to Source Voltage (Vgs)=20V, Manufacturer="Vishay Siliconix", Max Operating Temperature=150°C, Max Power Dissipation=1.25W, Min Operating Temperature=-55°C, Package Quantity=2500, Supplier Part Number=SI4816BDY-T1-E3CT-ND, Threshold Voltage=1V, Category=MOSFETs, ComponentLink1Description=https://datasheet.ciiva.com/16486/si4816bd-16486349.pdf?src-supplier=Future+Electronics, ComponentLink1URL=https://datasheet.ciiva.com/16486/si4816bd-16486349.pdf?src-supplier=Future+Electronics, Fall Time=9ns, FET Type="2 N-Channel", Height=1.55mm, Lead Free="Lead Free", Length=5mm, Manufacturer Part Number=SI4816BDY-T1-E3, Mounting Technology="Surface Mount", Nominal Vgs=3V, Number of Channels=2, Number of Elements=2, Packaging="Tape and Reel", Pins=8, Polarity=N-CHANNEL, Pricing="1=1.58, 10=1.311, 100=1.0438, 500=0.88324, 1000=0.74942 (USD)", Radiation Hardening=No, Rds On Max=18.5mR, Reach SVHC Compliant=Unknown, Rise Time=9ns, RoHS=Yes, RoHS Compliant=Yes, Series="LITTLE FOOT®", Stock=1332, Supplier=Digikey, Turn-Off Delay Time=31ns, Turn-On Delay Time=13ns, Weight=0.006596oz, Width=4mm
R1 R2 R13 R15: library part AC0805JR-070RL, "Zero Ohm Resistor, 0805 [2012 Metric], Thick Film, 125 mW, 2 A, Surface Mount", Case Code (Imperial)=0805, Case Code (Metric)=2012, Manufacturer=Yageo, Max Operating Temperature=155°C, Max Power Dissipation=125mW, Min Operating Temperature=-55°C, Supplier Part Number=YAG3755CT-ND, Temperature Coefficient=200ppm/°C, Tolerance=5%, Voltage Rating=150V, Case/Package=0805, Category="Chip SMD Resistors", ComponentLink1Description=https://datasheet.octopart.com/AC0805JR-070RL-Yageo-datasheet-166720450.pdf?src-supplier=Future+Electronics, ComponentLink1URL=https://datasheet.octopart.com/AC0805JR-070RL-Yageo-datasheet-166720450.pdf?src-supplier=Future+Electronics, ComponentLink2Description=http://www.yageo.com/documents/recent/PYu-AC_51_RoHS_L_2.pdf?src-supplier=Mouser, ComponentLink2URL=http://www.yageo.com/documents/recent/PYu-AC_51_RoHS_L_2.pdf?src-supplier=Mouser, Features="Moisture Resistant,Automotive AEC-Q200", Height=0.024inch, Lead Free=5697LeadFree, Length=0.079inch, Manufacturer Part Number=AC0805JR-070RL, Number of Terminations=2, Packaging="Tape and Reel", Power Rating=125mW, Pricing="1=0.1, 10=0.035, 25=0.0272, 50=0.0206, 100=0.0144, 250=0.0116, 500=0.00928, 1000=0.00683 (USD)", RoHS=Yes, RoHS Compliant=Yes, Series=AC, Stock=130832, Supplier=Digikey, Termination=SMD/SMT, Width=1.25mm
R3: library part AC0805FR-0710RL, "SMD Chip Resistor, 10 Ohm, ± 1%, 125 mW, 0805 [2012 Metric], Thick Film, General Purpose", Case Code (Imperial)=0805, Case Code (Metric)=2012, Manufacturer=Yageo, Max Operating Temperature=155°C, Max Power Dissipation=125mW, Min Operating Temperature=-55°C, Supplier Part Number=YAG3690CT-ND, Temperature Coefficient=200ppm/°C, Tolerance=1%, Voltage Rating=150V, Case/Package=0805, Category="Chip SMD Resistors", ComponentLink1Description=http://www.mouser.com/ds/2/447/yageodocoutput-1111992.pdf?src-supplier=Mouser, ComponentLink1URL=http://www.mouser.com/ds/2/447/yageodocoutput-1111992.pdf?src-supplier=Mouser, ComponentLink2Description=https://www.yageo.com/upload/media/product/productsearch/datasheet/rchip/PYu-AC_51_RoHS_L_7.pdf?src-supplier=Digikey, ComponentLink2URL=https://www.yageo.com/upload/media/product/productsearch/datasheet/rchip/PYu-AC_51_RoHS_L_7.pdf?src-supplier=Digikey, ComponentLink3Description=http://www.yageo.com/NewPortal/yageodocoutput?fileName=/pdf/R-Chip/PYu-AC_51_RoHS_L_6.pdf&src-supplier=Digikey, ComponentLink3URL=http://www.yageo.com/NewPortal/yageodocoutput?fileName=/pdf/R-Chip/PYu-AC_51_RoHS_L_6.pdf&src-supplier=Digikey, ComponentLink4Description=https://datasheet.octopart.com/AC0805FR-0710RL-Yageo-datasheet-151884373.pdf?src-supplier=Future+Electronics, ComponentLink4URL=https://datasheet.octopart.com/AC0805FR-0710RL-Yageo-datasheet-151884373.pdf?src-supplier=Future+Electronics, ComponentLink5Description=http://www.yageo.com/documents/recent/PYu-AC_51_RoHS_L_2_revised.pdf?src-supplier=Future+Electronics, ComponentLink5URL=http://www.yageo.com/documents/recent/PYu-AC_51_RoHS_L_2_revised.pdf?src-supplier=Future+Electronics, Features="Moisture Resistant,Automotive AEC-Q200", Height=0.024inch, Lead Free="Lead Free", Length=0.079inch, Manufacturer Part Number=AC0805FR-0710RL, Number of Terminations=2, Packaging="Tape and Reel", Power Rating=125mW, Pricing="1=0.11, 10=0.052, 50=0.0338, 100=0.0286, 500=0.02014, 1000=0.01754 (USD)", RoHS=Yes, RoHS Compliant=Yes, Series=AC, Stock=169764, Supplier=Digikey, Termination=SMD/SMT, Width=1.25mm
R4 R5: library part AC0805FR-071RL, "SMD Chip Resistor, 1 Ohm, ± 1%, 125 mW, 0805 [2012 Metric], Thick Film, General Purpose", Case Code (Imperial)=0805, Case Code (Metric)=2012, Manufacturer=Yageo, Max Operating Temperature=155°C, Max Power Dissipation=125mW, Min Operating Temperature=-55°C, Supplier Part Number=YAG3705CT-ND, Temperature Coefficient=200ppm/°C, Tolerance=1%, Voltage Rating=150V, Case/Package=0805, Category="Chip SMD Resistors", ComponentLink1Description=https://datasheet.ciiva.com/12576/pyu-ac-51-rohs-l-2-12576553.pdf?src-supplier=Mouser, ComponentLink1URL=https://datasheet.ciiva.com/12576/pyu-ac-51-rohs-l-2-12576553.pdf?src-supplier=Mouser, Features="Moisture Resistant,Automotive AEC-Q200", Height=0.024inch, Lead Free="Lead Free", Length=0.079inch, Manufacturer Part Number=AC0805FR-071RL, Number of Terminations=2, Packaging="Tape and Reel", Power Rating=125mW, Pricing="1=0.11, 10=0.052, 50=0.0338, 100=0.0286, 500=0.02014, 1000=0.01754 (USD)", RoHS=Yes, RoHS Compliant=Yes, Series=AC, Stock=72108, Supplier=Digikey, Termination=SMD/SMT, Weight=0.000194oz, Width=1.25mm
R6 R7 R9 R10: library part AC0805FR-07200KL, "SMD Chip Resistor, 200 kOhm, ± 1%, 125 mW, 0805 [2012 Metric], Thick Film, General Purpose", Case Code (Imperial)=0805, Case Code (Metric)=2012, Manufacturer=Yageo, Max Operating Temperature=155°C, Min Operating Temperature=-55°C, Package Quantity=5000, Power Rating=125mW, Supplier Part Number=YAG3706CT-ND, Temperature Coefficient=100ppm/°C, Tolerance=1%, Voltage Rating=150V, Category="Chip SMD Resistors", ComponentLink1Description=http://www.mouser.com/ds/2/447/yageodocoutput-1111992.pdf?src-supplier=Mouser, ComponentLink1URL=http://www.mouser.com/ds/2/447/yageodocoutput-1111992.pdf?src-supplier=Mouser, ComponentLink2Description=http://www.yageo.com/documents/recent/PYu-AC_51_RoHS_L_2.pdf?src-supplier=Future+Electronics, ComponentLink2URL=http://www.yageo.com/documents/recent/PYu-AC_51_RoHS_L_2.pdf?src-supplier=Future+Electronics, ComponentLink3Description=https://datasheet.octopart.com/AC0805FR-07200KL-Yageo-datasheet-151884373.pdf?src-supplier=Future+Electronics, ComponentLink3URL=https://datasheet.octopart.com/AC0805FR-07200KL-Yageo-datasheet-151884373.pdf?src-supplier=Future+Electronics, ComponentLink4Description=http://www.yageo.com/NewPortal/yageodocoutput?fileName=/pdf/R-Chip/PYu-AC_51_RoHS_L_6.pdf&src-supplier=Digikey, ComponentLink4URL=http://www.yageo.com/NewPortal/yageodocoutput?fileName=/pdf/R-Chip/PYu-AC_51_RoHS_L_6.pdf&src-supplier=Digikey, Height=0.5mm, Lead Free="Lead Free", Length=2mm, Manufacturer Part Number=AC0805FR-07200KL, Packaging="Cut Tape", Pricing="1=0.1, 10=0.031, 50=0.0198, 100=0.0166, 500=0.01152, 1000=0.00997 (USD)", RoHS=Yes, RoHS Compliant=Yes, Series=AC, Stock=311, Supplier=Digikey, Technology="THICK FILM", Termination=SMD/SMT, Weight=0.000194oz, Width=1.25mm
R8 R11: library part AC0805FR-0710KL, "Res Thick Film 0805 10K Ohm 1% 0.125W(1/8W) ±100ppm/C Pad SMD Automotive T/R", Case Code (Imperial)=0805, Case Code (Metric)=2012, Manufacturer=Yageo, Max Operating Temperature=155°C, Max Power Dissipation=125mW, Min Operating Temperature=-55°C, Package Quantity=1, Supplier Part Number=311-10KLGCT-ND, Temperature Coefficient=100ppm/°C, Tolerance=1%, Voltage Rating=150V, Case/Package=0805, Category="Chip SMD Resistors", ComponentLink1Description=http://www.yageo.com/NewPortal/yageodocoutput?fileName=/pdf/R-Chip/PYu-AC_51_RoHS_L_6.pdf&src-supplier=Digikey, ComponentLink1URL=http://www.yageo.com/NewPortal/yageodocoutput?fileName=/pdf/R-Chip/PYu-AC_51_RoHS_L_6.pdf&src-supplier=Digikey, ComponentLink2Description=http://www.yageo.com/documents/recent/PYu-AC_51_RoHS_L_2_revised.pdf?src-supplier=Future+Electronics, ComponentLink2URL=http://www.yageo.com/documents/recent/PYu-AC_51_RoHS_L_2_revised.pdf?src-supplier=Future+Electronics, ComponentLink3Description=http://www.yageo.com/NewPortal/yageodocoutput?fileName=/pdf/R-Chip/PYu-AC_51_RoHS_L_6.pdf&src-supplier=NAC+Semi, ComponentLink3URL=http://www.yageo.com/NewPortal/yageodocoutput?fileName=/pdf/R-Chip/PYu-AC_51_RoHS_L_6.pdf&src-supplier=NAC+Semi, ComponentLink4Description=http://www.yageo.com/NewPortal/yageodocoutput?fileName=/pdf/R-Chip/PYu-AC_51_RoHS_L_6.pdf&src-supplier=Rutronik, ComponentLink4URL=http://www.yageo.com/NewPortal/yageodocoutput?fileName=/pdf/R-Chip/PYu-AC_51_RoHS_L_6.pdf&src-supplier=Rutronik, Construction=Rectangular, Depth=1.25mm, Features="Moisture Resistant,Automotive AEC-Q200,Anti-Sulfur", Height=0.024inch, Lead Free="Lead Free", Length=0.079inch, Manufacturer Part Number=AC0805FR-0710KL, Military Standard=Not, Number of Terminations=2, Packaging="Tape and Reel", Power Rating=125mW, Pricing="1=0.1, 10=0.031, 50=0.0198, 100=0.0166, 500=0.01152, 1000=0.00997 (USD)", RoHS=Yes, RoHS Compliant=Yes, Series=AC, Stock=458520, Supplier=Digikey, Termination=SMD/SMT, Width=0.049inch
R12 R14 R16 R17 R18: library part RES
U1: "Soft Sw PWM Cntrlr 2-OUT Power Supply Controller 200KHz/300KHz/400KHz/500KHz 32-Pin QFN EP", Frequency=500kHz, Manufacturer=Renesas, Output Voltage=5.5V, Supplier Part Number=ISL6236AIRZ-ND, ComponentLink1Description=https://datasheet.octopart.com/ISL6236AIRZ-Renesas-datasheet-138160199.pdf?src-supplier=Future+Electronics, ComponentLink1URL=https://datasheet.octopart.com/ISL6236AIRZ-Renesas-datasheet-138160199.pdf?src-supplier=Future+Electronics, ComponentLink2Description=http://www.intersil.com/content/dam/Intersil/documents/isl6/isl6236a.pdf?src-supplier=Digikey, ComponentLink2URL=http://www.intersil.com/content/dam/Intersil/documents/isl6/isl6236a.pdf?src-supplier=Digikey, Manufacturer Part Number=ISL6236AIRZ, Pricing="1=6.37, 10=5.754, 25=5.4868, 80=4.76413, 230=4.55004, 490=4.14857, 980=3.61328, 2450=3.47945 (USD)", RoHS=Yes, Stock=1323, Supplier=Digikey

## Via types
v1: diameter 0.6, hole 0.3, L1 to L6, tented both sides, 58 vias

## Nets (pads, with @x,y where several pads share a name; then routed paths per layer and width w, separated by ;. In a path a pad name is that pad's centre, name@x,y a point inside that pad or via, vN(x,y) a via of type N, cw(c..) or ccw(c..) an arc to the next point about the centre after c; other vN are vias at no path point)
+1V5: C9.1 J3.1 L1.1 R12.2 U1.10 | length 15
  L3 w0.5: v1(31.4,18.5) 33.1,18.5 34.7,16.9 36.5,16.9 36.8,16.6 36.8,15.464 36.7,15.364 v1(36.7,14.2)
  L6 w0.2: U1.10 26.6,21.2 27.1,20.7 ; R12.2@30.067,18.533 R12.2
  L6 w0.5: 27.1,20.7 29.267,18.533 R12.2@30.067,18.533 ; R12.2 31.3,18.5 v1(31.4,18.5)
+1V05: C10.1 J4.1 L2.2 U1.30 | length 18.9
  L3 w0.5: v1(25.7,27.9) 25.7,35.607 26.093,36 v1(35.2,36)
  L6 w0.2: 25.7,27.5 25.7,27.4 26.1,27 U1.30
  L6 w0.5: 25.7,27.5 v1(25.7,27.9)
+5V_LDO: C1.2 R1.2 U1.7 | length 25.1
  L3 w0.5: v1(13.2,24.6) 13.95,23.85 15.85,23.85 16.1,23.6 21.7,23.6 24.5,20.8 v1(31.1,20.8)
  L6 w0.2: v1(13.2,24.6) R1.2 ; U1.7 28.45,22.85 29.45,21.85 C1.2 ; C1.2@29.45,20.783 29.467,20.8 v1(31.1,20.8)
+5V_PVCC: C3.2 R2.2 R3.1 R8.1 R9.2 R10.2 R11.1 R13.2 R16.2 U1.2 U1.19 U1.20 | length 69.9
  L4 w0.2: v1(21.9,24.4) 21.9,21.6 22.7,20.8 22.7,19.354 22.4,19.054 v1(22.4,17.5) 24,17.5 27.6,21.1 27.6,24.4 28.6,25.4 v1(28.6,26.543)
  L6 w0.2: 20.433,23.567 20.75,23.25 22.511,23.25 22.596,23.335 22.935,23.335 U1.19 ; v1(21.9,24.4) 22.435,23.865 22.935,23.865 U1.20 ; v1(22.4,17.5) 22.4,16.85 22.65,16.6 R11.1 ; R16.2 27.4,35.4 28.417,36.417 28.583,36.417 28.6,36.4 30.283,36.4 30.4,36.283 30.4,34.3 30.848,33.852 ; U1.2 27.765,25.365 28.104,25.365 28.6,25.861 v1(28.6,26.543) 28.6,27.226 28.25,27.576 28.25,31.15 29.6,32.5 29.6,33.4 30.052,33.852 30.848,33.852 ; R8.1 32.2,30.35 R3.1 31.4,32.3 31.296,32.404 31.296,33.404 30.848,33.852
  L6 w0.5: R9.2 14,27.55 R2.2 14.05,26.424 14.274,26.2 19.8,26.2 20.433,25.567 C3.2@20.433,24.5 ; 20.433,23.567 C3.2@20.433,24.5 ; v1@21.873,24.4 20.45,24.4 C3.2 C3.2@20.433,24.5 ; R11.1 22.8,16.7 22.8,16.907 23.493,17.6 26.3,17.6 27.3,16.6 R13.2
+REF: C12.1 R14.2 U1.1 | length 11.6
  L6 w0.2: R14.2 27.4,32.75 27.4,31.8 27.75,31.8 ; U1.1 27.75,31.8 ; C12.1 29.6,34.233 28.6,33.233 28.6,32.3 28.1,31.8 27.75,31.8
+VIN: C2.2 C5.2 C6.2 J1.1 Q1.8 Q2.8 R2.1 U1.6 | length 4.5
  L6 w0.2: U1.6 29.25,23.35
  L6 w0.5: R2.1 15.95,28.923 16,28.973 v1(16,29) ; 29.25,23.35 29.331,23.269 29.731,23.269 v1(29.75,23.25) 29.769,23.269 30.669,23.269 C2.2
+VREF3: C11.1 R15.2 U1.5 | length 23.3
  L6 w0.25: R15.2 27.5,37.3 32.4,37.3 33.5,36.2 33.5,27.517 32.833,26.85 30.717,26.85 30.6,26.733 30.6,25.5 30.275,25.175 30.075,25.175 28.75,23.85 U1.5
EN_1: R8.2 U1.4 | length 8.5
  L6 w0.2: U1.4 28.35,24.35 29.6,25.6 29.6,26.6 30.4,27.4 32,27.4 32.253,27.653 32.253,28 R8.2@32.003,28.25 ; R8.2 R8.2@32.003,28.25 ; 32.253,29.497 32.253,28.5 R8.2@32.003,28.25
EN_LDO: R11.2 U1.14 | length 4.2
  L6 w0.2: R11.2@22.712,18.512 22.712,19.398 22.929,19.615 23.266,19.615 24.597,20.945 U1.14@24.597,21.7
FB1: R12.1 R13.1 R17.2 U1.11 | length 11.8
  L6 w0.2: 26.1,20.5 U1.11 ; 30.023,17.66 30.074,17.609
  L6 w0.5: 26.1,20.5 27.32,19.28 27.32,18.6 27.42,18.5 R13.1 27.4,18.3 27.4,18 27.791,17.609 30.074,17.609 ; R12.1@30.091,16.609 30.091,17.609 32.063,17.609 32.355,17.316 32.355,16.7 32.455,16.6 R17.2
GND: C1.1 C2.1 C3.1 C4.1 C5.1 C6.1 C9.2 C10.2 C11.2 C12.2 J2.1 J5.1 J6.1 Q1.2 Q1.3 Q2.2 Q2.3 R6.2 R7.1 R17.1 R18.1 U1.8 U1.21 U1.22 U1.29 U1.33 | length 19.5
  L1 w0.2: v1@14.012,20 C5.1 ; v1@14.012,44 C6.1
  L6 w0.2: v1(17.4,24.5) C3.1 ; U1.21 U1.33@23.8,24.35 ; U1.22 U1.33@23.9,24.85 ; v1(25.2,15.7) R7.1 R7.1@25.2,16.75 ; U1.33@25.6,25.6 U1.29 ; R18.1 v1(28.8,39.7) ; U1.8 27.75,21.93 28.016,21.664 28.336,21.664 v1(28.4,21.6) ; C12.2 31.5,34.9 32.5,33.9 v1(32.5,33.7) ; C11.2 C11.2@32.6,25.8 ; R17.1@33.05,18.5 v1(34.7,18.5)
  L6 w0.5: R6.2 v1(24.5,31.5) ; C4.1 v1(29.2,31.05) ; C12.2@31.5,35 v1(31.5,36)
  L6 w0.75: C1.1 v1(33.7,20.8) ; C2.1 v1(33.8,23.3) ; C11.2@32.6,25.8 v1(33.7,25.8)
  other v1: 11.118,14.347 11.118,15.617 36.75,18.4 40.5,18.4 13.995,19.983 36.75,20.9 40.5,20.9 24.2,22.9 26.5,22.9 25.35,24.1 24.1,25.3 26.6,25.3 36.75,29 40.5,29 36.75,31.5 40.5,31.5 11.118,38.348 11.1,39.6 13.995,43.983
LGATE1: Q1.4 U1.18 | length 21.5
  L3 w0.5: v1(10.8,13) 10.773,13 10.696,13.077 10.493,13.077 10.1,13.469 10.1,20.1 12.748,22.748 v1(19.516,22.748)
  L6 w0.2: v1(19.516,22.748) 19.568,22.8 21,22.8 21.05,22.85 22.785,22.85 22.8,22.835 22.815,22.85 U1.18
LGATE2: Q2.4 U1.23 | length 20
  L1 w0.5: Q2.4 11.75,37.045 13.018,37.045 13.073,37.1 v1(13.1,37.1)
  L3 w0.5: v1(13.1,37.1) 15.8,37.1 19,33.9 19,27.5 21.2,25.3 v1(21.9,25.3)
  L6 w0.2: v1(21.9,25.3) 21.95,25.35 U1.23
NetC4_2: C4.2 R1.1 R3.2 U1.3 | length 31.7
  L4 w0.2: v1(15,24.6) 15.5,25.1 17.683,25.1 17.8,25.217 17.8,29.9 19.1,31.2 23,31.2 25.2,29 v1(29.2,29)
  L6 w0.2: v1(15,24.6) R1.1 ; U1.3 28.233,24.85 29.2,25.817 C4.2 ; v1(29.2,29) C4.2 ; R3.2 30.3,28.4 30.05,28.15 C4.2
NetC7_2: C7.2 R4.1 | length 2.5
  L6 w0.2: C7.2 18.4,19.496 R4.1
NetC8_2: C8.2 R5.2 | length 3.4
  L6 w0.2: R5.2 18.2,27.7 C8.2
NetR4_2: R4.2 U1.17 | length 2.9
  L6 w0.2: R4.2 21.05,21.85 21.45,22.25 22.199,22.25 22.299,22.35 U1.17
NetR5_1: R5.1 U1.24 | length 3.9
  L6 w0.2: R5.1 19.9,27.227 20.15,26.977 21.238,26.977 22.365,25.85 U1.24
NetR6_1: R6.1 U1.31 | length 4.1
  L6 w0.2: R6.1 26.4,28.6 26.6,28.4 U1.31
NetR7_2: R7.2 U1.12 | length 3.4
  L6 w0.2: R7.2 25.2,20.162 25.55,20.512 25.55,20.981 25.6,21.031 U1.12
PHASE1: C7.1 L1.2 Q1.5 Q1.6 Q1.7 U1.16 | length 8.8
  L3 w0.5: v1(20.2,18.2) 20.2,15.627 20.3,15.527 v1(20.3,15.5)
  L6 w0.2: 23.081,21.5 23.585,21.5 23.6,21.515 U1.16
  L6 w0.25: C7.1 20.374,19.57 20.374,20.274 21.6,21.5 23.081,21.5
  L6 w0.5: v1(20.2,18.2) C7.1
PHASE2: C8.1 L2.1 Q2.5 Q2.6 Q2.7 U1.25 | length 10
  L3 w0.5: v1(20.1,32.1) v1(20.1,34.539)
  L6 w0.2: 22.7,26.5 U1.25
  L6 w0.5: v1(20.1,32.1) C8.1 20.1,29.1 22.7,26.5
POK1: R10.1 U1.13 U1.27 | length 27.1
  L4 w0.2: v1(22.4,30.4) 22.4,28.7 23,28.1 23,21.5 v1(24.5,20)
  L6 w0.2: R10.1 16.033,31.033 16.433,31.033 18.1,32.7 21.175,32.7 22.442,31.432 22.442,30.442 v1(22.4,30.4) 22.4,28.71 23.61,27.5 24.005,27.5 24.585,26.92 24.585,26.515 U1.27 ; v1(24.5,20) 24.5,20.234 25.1,20.834 U1.13
POK2: R9.1 U1.28 | length 14.3
  L6 w0.2: R9.1 22,33.2 23.223,31.977 23.223,28.452 23.776,27.9 24.171,27.9 25.085,26.986 25.085,26.515 U1.28
REFIN2: R14.1 R15.1 R16.1 R18.2 U1.32 | length 13.9
  L6 w0.25: R18.2 R15.1 R16.1 25.5,32.85 R14.1 25.45,31.15 27.1,29.5 U1.32
UGATE1: Q1.1 U1.15 | length 15
  L1 w0.5: Q1.1 13.878,16.805 13.973,16.9 v1(14,16.9)
  L3 w0.5: v1(14,16.9) 14.019,16.919 15.019,16.919 17.381,19.281 21.488,19.281 21.781,19.574 21.781,20.181 v1(21.8,20.2)
  L6 w0.2: v1(21.8,20.2) 22.939,20.2 24.085,21.346 24.085,21.685 U1.15
UGATE2: Q2.1 U1.26 | length 24.2
  L1 w0.5: Q2.1 12.45,40.805 13.736,39.519 13.981,39.519 v1(14,39.5)
  L3 w0.5: v1(14,39.5) 19,39.5 21.6,36.9 v1(21.6,28.8)
  L6 w0.2: v1(21.6,28.8) 21.6,29.827 ; v1@21.7,28.7 23.3,27.1 23.839,27.1 24.085,26.854 24.085,26.515 U1.26
pads on no net: U1.9

## Polygon pours and split planes (outlines as drawn)
+VIN on L1 "+VIN_L01_P008" (solid, pour order 8): 18.5,45.25 18.75,45 18.75,42 18,41.25 18,40.75 17.75,40.5 8.5,40.5 7.5,39.5 7.5,32 7.75,31.75 16.5,31.75 17,31.25 17,21.75 17.5,21.25 28.5,21.25 29.25,22 29.25,24.25 29.5,24.5 30.75,24.5 31,24.25 30.75,24 30.75,19.25 30,18.5 18.25,18.5 18,18.25 18,16.75 17.75,16.5 16.5,16.5 15.5,17.5 15.5,24 12,27.5 2.75,27.5 2.25,28 2.25,40.5 7,45.25
GND on L1 "GND_L01_P015" (solid, pour order 15): 36.25,21.9 36.25,17.65 41,17.65 41,21.9
GND on L1 "GND_L01_P014" (solid, pour order 14): 36.25,32.5 36.25,28.25 41,28.25 41,32.5
+1V05 on L1 "+1V05_L01_P003" (solid, pour order 3): 30.4,34.3 30.4,39.8 34.1,39.8 36.3,37.6 40,37.6 40.9,38.5 46.7,38.5 47.7,37.5 47.7,34.4 46.8,33.5 40.4,33.5 39.9,34 34.5,34 34.2,34.3 30.8,34.3
+1V5 on L1 "+1V5_L01_P002" (solid, pour order 2): 30.4,15.7 30.4,10.2 34.1,10.2 36.3,12.4 40,12.4 40.9,11.5 46.7,11.5 47.7,12.5 47.7,15.6 46.8,16.5 40.4,16.5 39.9,16 34.5,16 34.2,15.7 30.8,15.7
PHASE1 on L1 "PHASE1_L01_P001" (solid, pour order 1): 16.5,16 16.5,12.7 17.5,12.7 20.2,10 24.5,10 24.5,16
PHASE2 on L1 "PHASE2_L01_P000" (solid, pour order 0): 16.564,39.944 16.6,39.908 16.6,36.7 19.1,34.2 24.3,34.2 24.3,39.944
GND on L2 (split plane): 49.49,0.51 0.51,0.51 0.51,49.49 49.49,49.49
GND on L5 (split plane): 49.49,0.51 0.51,0.51 0.51,49.49 49.49,49.49

## Other copper
L1:
  text "FEDEVEL 2024" at 2.254,3.954 h1.52
  text "ALTIUM ESSENTIAL" at 2.254,1.854 h1.52

## Silkscreen, mask and mechanical layers (free items; w line width, h text height)
Top Overlay:
  text "+1V05" at 41.731,39.489 h1.52
  text "+VIN" at 2.154,32.154 h1.52
  text "GND" at 43.154,26.254 h1.52
  text "GND" at 43.054,23.154 h1.52
  text "GND" at 3.154,16.054 h1.52
  text "+1V5" at 41.854,9.354 h1.52
Bottom Overlay:
  lines w0.254: 16.35,17 16.35,18.95 16.9,19.5 ; 18.7,32.3 18.7,34 16.7,36 ; 26.9,27.3 26.9,28.6 ; 16.7,36 16.7,36 ; 14.1,9.8 14.1,16.3 14.8,17 17.9,17 17.9,9.8 14.1,9.8 ; 14.7,36.1 14.7,40.7 14.8,40.8 18.3,40.8 18.3,36.1 14.7,36.1
Top Solder:
  text "FEDEVEL 2024" at 2.3,4 h1.52
  text "ALTIUM ESSENTIAL" at 2.3,1.9 h1.52
Board Outline:
  lines w0.5: 0,0 0,49.9 49.9,49.9 50,50 50,0 0,0

## Text inside footprints (layer, text, board x,y; h text height)
Q1: Top Overlay "1" at 11.1,18 h0.9 r270
Q2: Top Overlay "1" at 11.1,42 h0.9 r270